# Altium PCB Drone Project.PcbDoc (part 1 of 2)
Units mm, origin at the board's own origin, x right, y up, seen from the top; angles counter-clockwise.
Board outline 39 x 39 mm, 4 copper layers (Top Layer, Int1 (GND), Int2 (GND_2), Bottom Layer), stack 1.564 mm thick; 49 components, 40 nets, 218 pads, 52 vias.
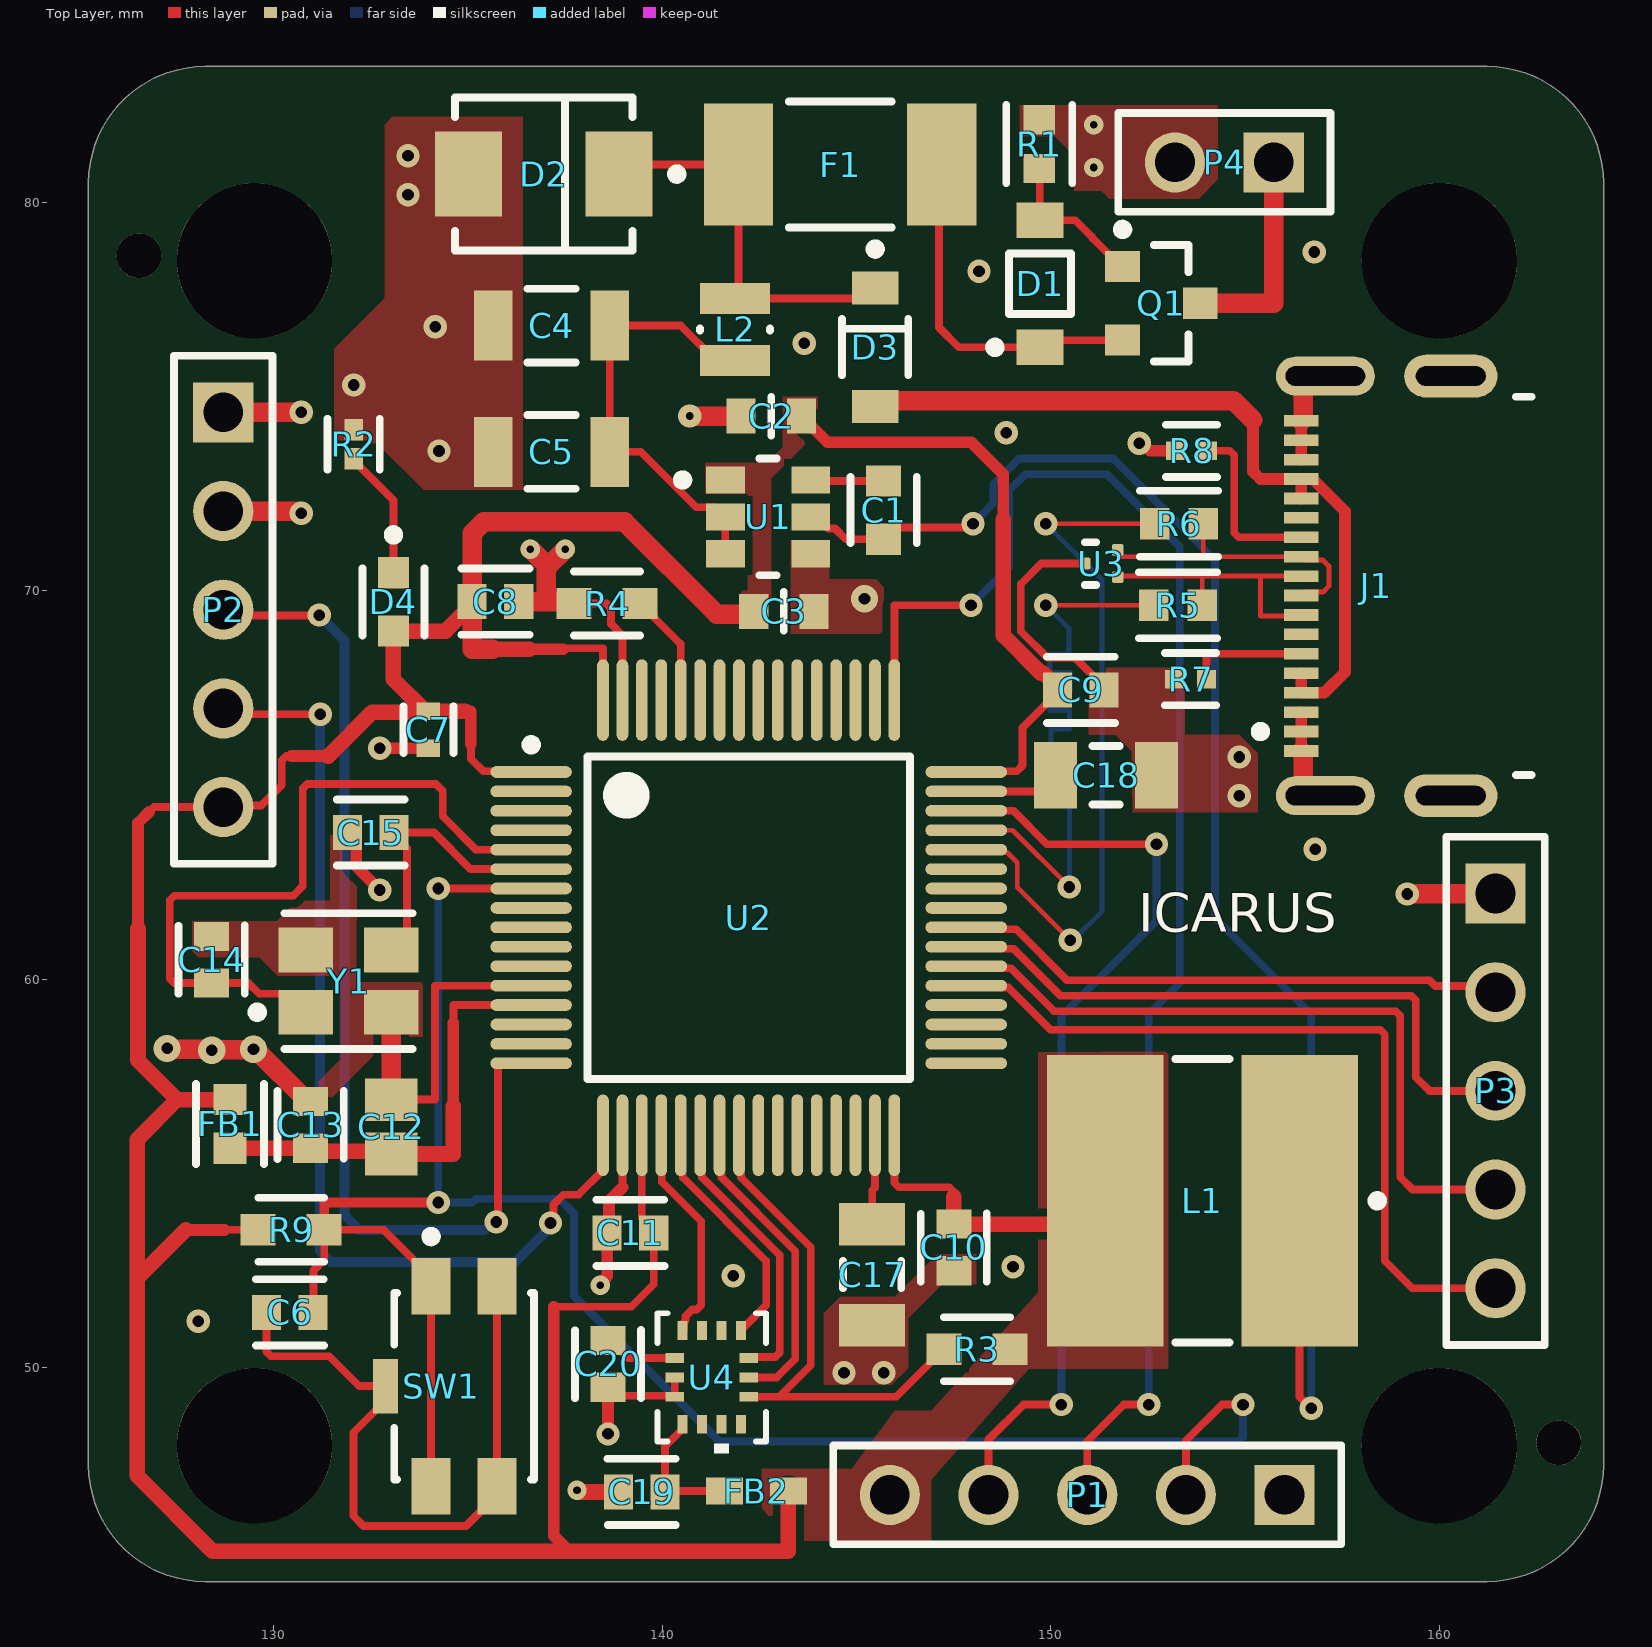
[diagram p0: Top Layer view]
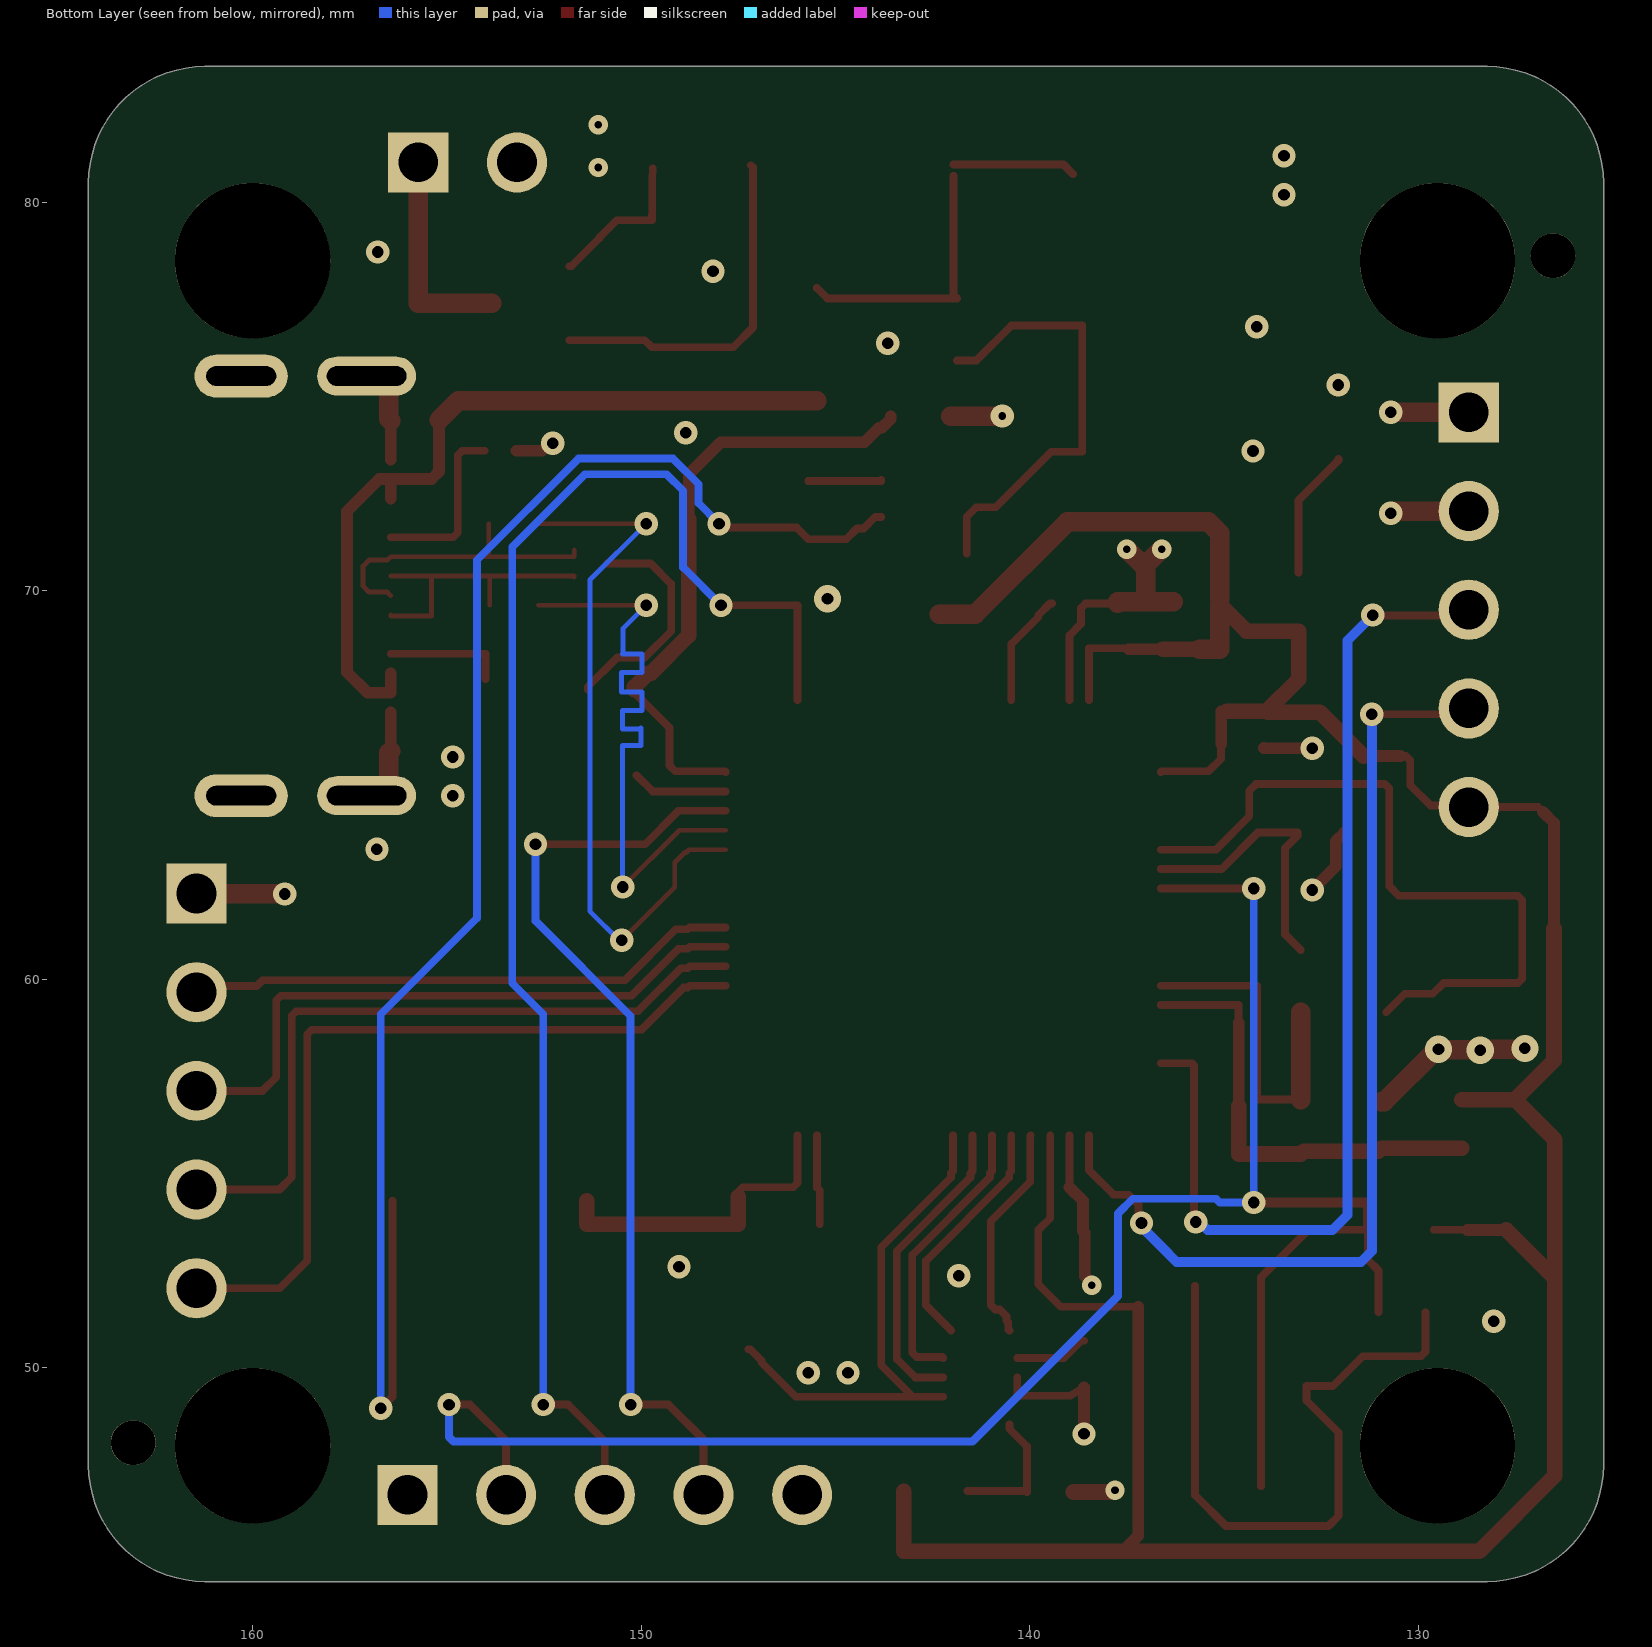
[diagram p1: Bottom Layer view, seen from below]
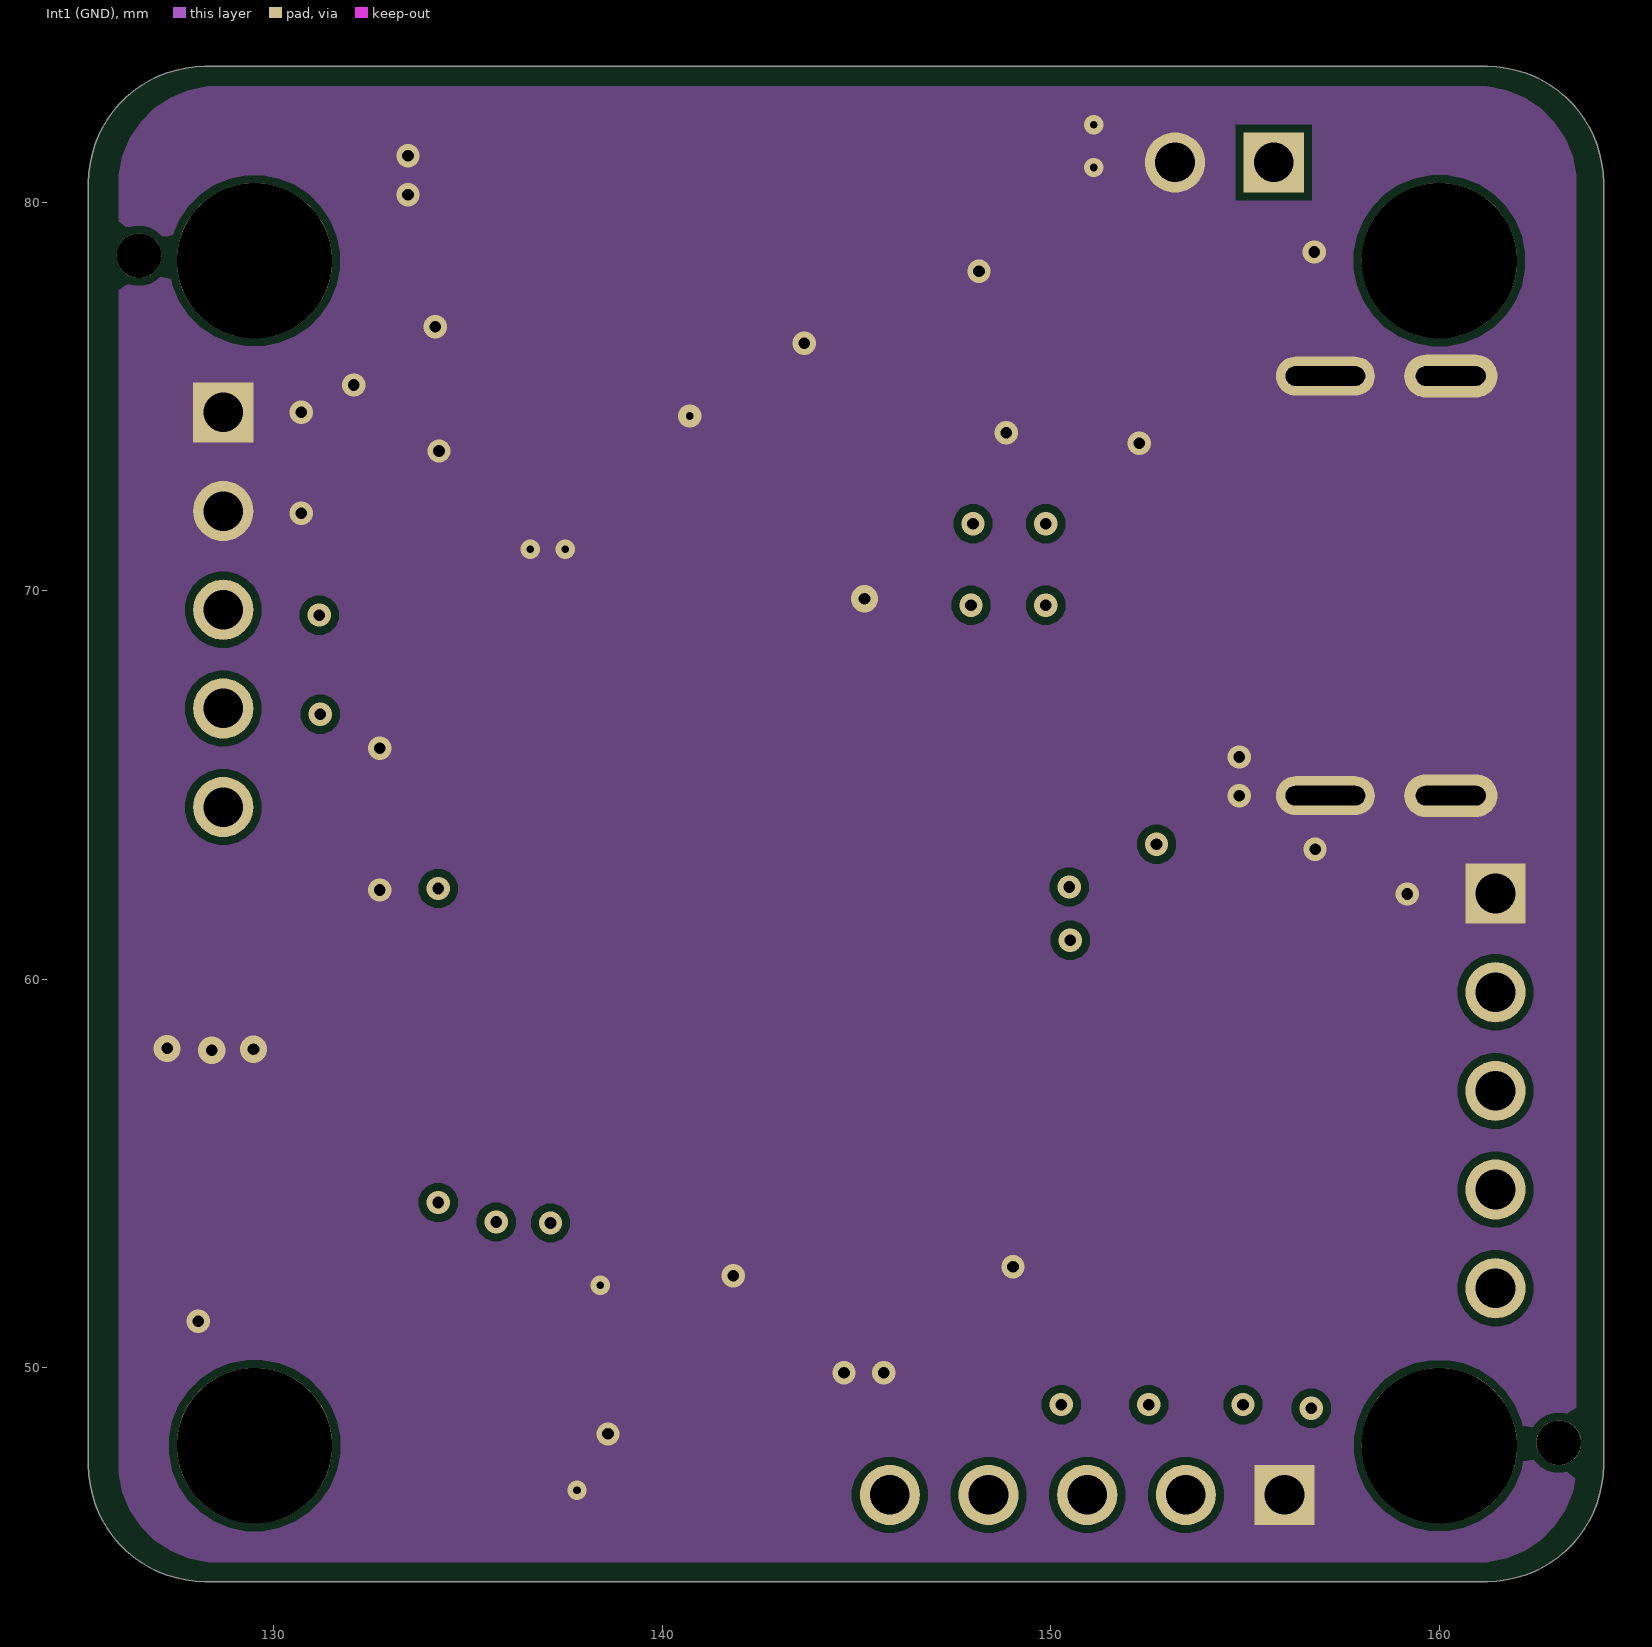
[diagram p2: Int1 (GND)]
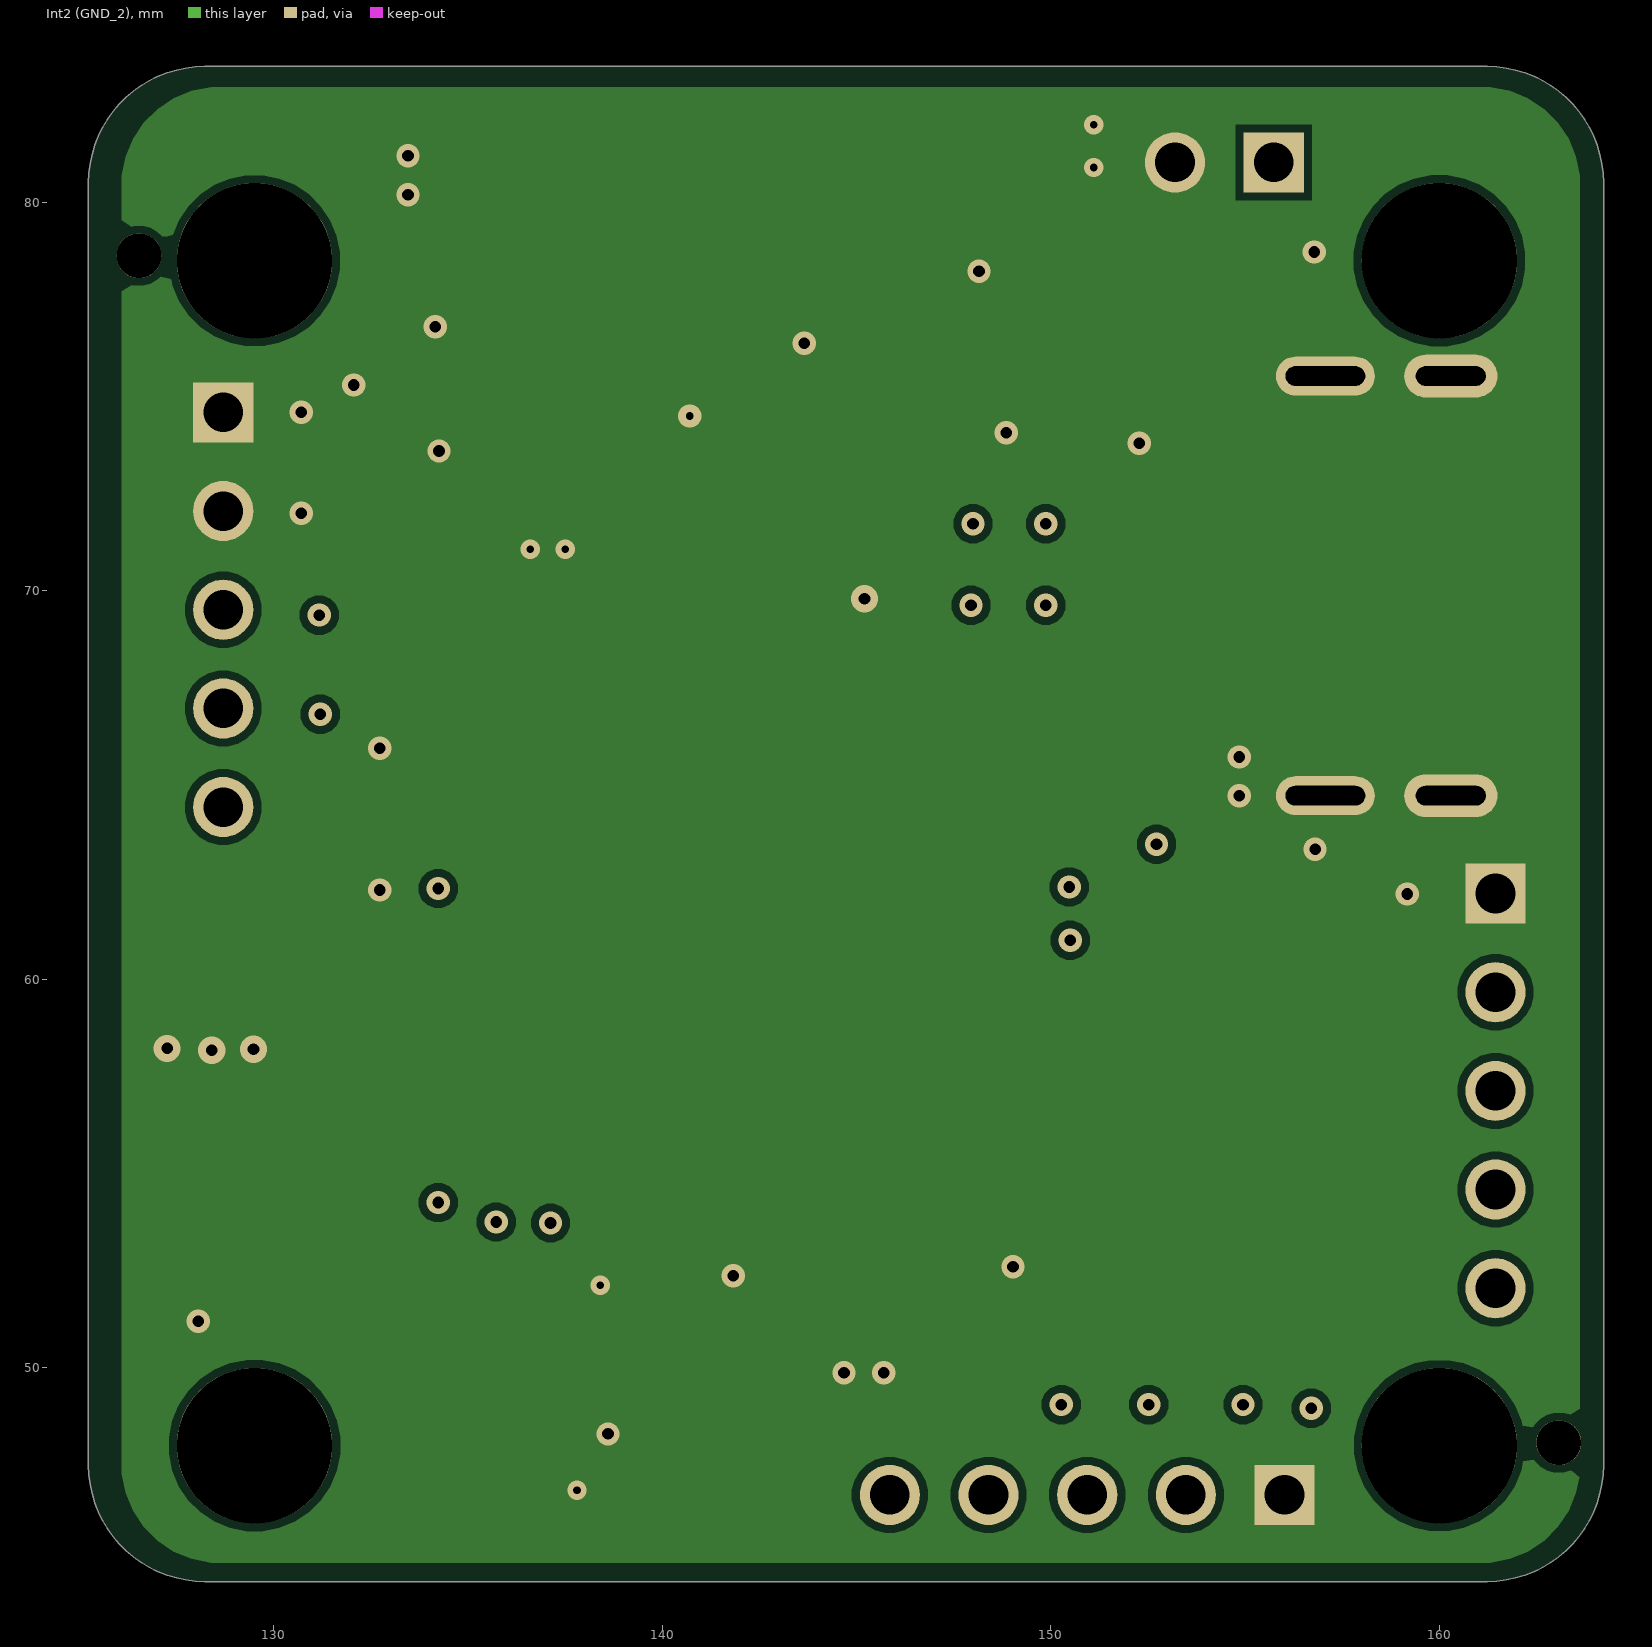
[diagram p3: Int2 (GND_2)]
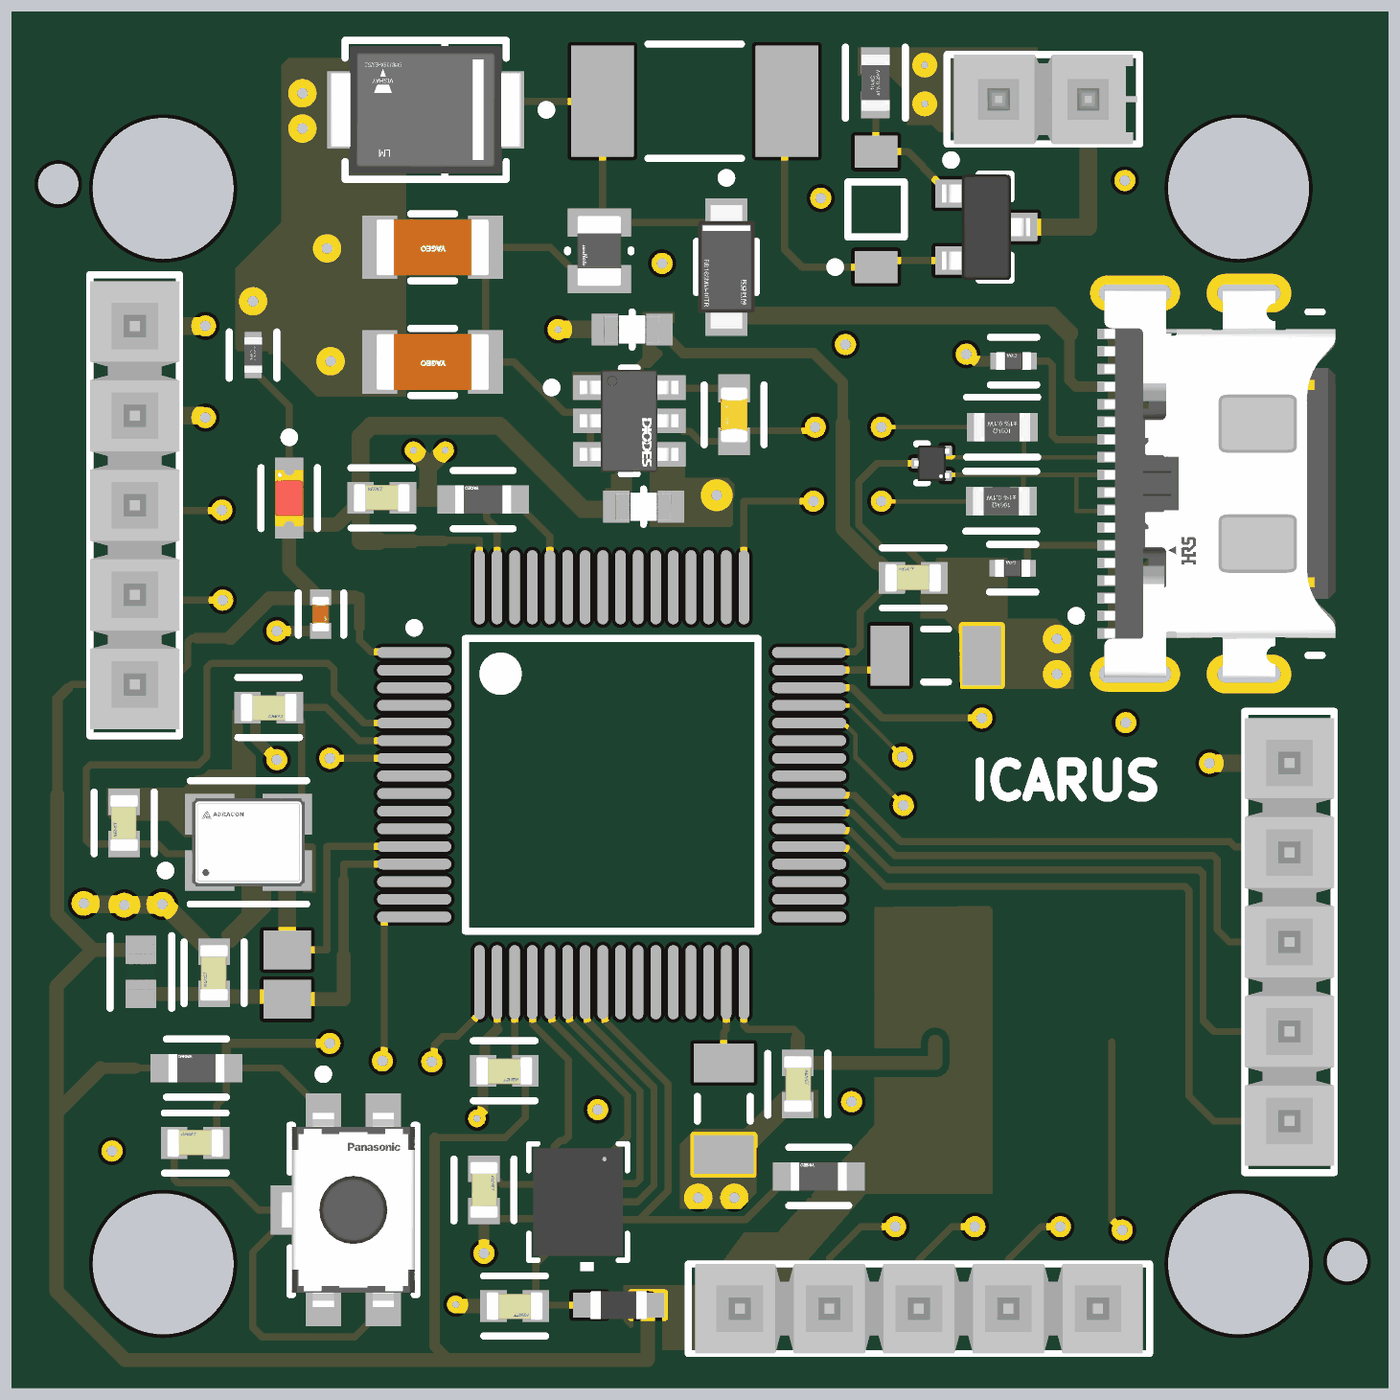
[diagram p4: 3D render of the assembled board from above, using the file's embedded part models]

## Layer stack, top to bottom
Top Solder: solder mask 0.0254, SM-001, Dk 4
Top Layer: signal copper 0.035
Dielectric 1: prepreg 0.0994, PP-017, Dk 4.1
Int1 (GND): signal copper 0.0152
Dielectric 3: core 1.265, Core-039, Dk 4.6
Int2 (GND_2): signal copper 0.0152
Dielectric 5: prepreg 0.0994, PP-017, Dk 4.1
Bottom Layer: signal copper 0.035
Bottom Solder: solder mask 0.0254, SM-001, Dk 4

## Board outline
125.225,47.5 125.225,80.5 cw(c128.225,80.5) 128.225,83.5 161.225,83.5 cw(c161.225,80.5) 164.225,80.5 164.225,47.5 cw(c161.225,47.5) 161.225,44.5 128.225,44.5 cw(c128.225,47.5)

## Design rules (kind name [scope] priority, off if disabled: settings)
Clearance [All] p1: gap=0.2 ignorepadtopadclearanceinfootprint=TRUE except(0.1: Arc-Arc Arc-Track Track-Track)
DiffPairsRouting [All] p1: maxlimit=0.127 minlimit=0.127 mostfreqgap=0.127 toplayer_minwidth=0.125 toplayer_maxwidth=0.125 toplayer_prefwidth=0.125 bottomlayer_minwidth=0.125 bottomlayer_maxwidth=0.125 bottomlayer_prefwidth=0.125 impedanceprofiledriven=TRUE impedanceprofileid={B2BF1141-F29F-4FC9-8BD8-2E5DBA5D9863} impedanceprofilevalue=90.000000 maxuncoupledlength=12.7
HoleSize [All] p1: absolutevalues=TRUE maxlimit=4 minlimit=0.025 maxpercent=80.000 minpercent=20.000
MinimumSolderMaskSliver [All] p1: minsoldermaskwidth=0.1
PolygonConnect [All] p1: connectstyle=Direct reliefconductorwidth=0.254 reliefentries=4 polygonreliefangle="90 Angle" airgapwidth=0.254
RoutingVias [All] p1: holewidth=0.3 width=0.6 viastyle="Through Hole" minholewidth=0.25 minwidth=0.55 maxholewidth=0.4 maxwidth=0.9
SilkToSolderMaskClearance [IsPad] p1: minsilkscreentomaskgap=0.15 clearancetoexposedcopper=TRUE
SolderMaskExpansion [All] p1: expansion=0.102 istentingtop=FALSE
SupplyNets "Schematic Supply Nets_4" [InNet('3V3')] p1: voltage=0.000
SupplyNets "Schematic Supply Nets_3" [InNet('USB_VBUS')] p2: voltage=0.000
SupplyNets "Schematic Supply Nets_2" [InNet('V_BAT')] p3: voltage=0.000
SupplyNets "Schematic Supply Nets_1" [InNet('GND')] p4: voltage=0.000
SupplyNets "Schematic Supply Nets" [InNet('3V3A')] p5: voltage=0.000
Width Width_1 [All] p1: maxlimit=0.5 minlimit=0.1 preferedwidth=0.254 toplayer_prefwidth=0.2 midlayer1_minwidth=0.254 midlayer1_maxwidth=0.254 midlayer2_minwidth=0.254 midlayer2_maxwidth=0.254 bottomlayer_maxwidth=0.254 minimp=50.000000 maximp=50.000000 favimp=50.000000
Width USB_Width [InNet('USB_D_P') Or InNet('USB_D_N')] p2: maxlimit=0.254 minlimit=0.125 preferedwidth=0.254 toplayer_maxwidth=0.125 toplayer_prefwidth=0.125 midlayer1_minwidth=0.254 midlayer2_minwidth=0.254 bottomlayer_maxwidth=0.125 bottomlayer_prefwidth=0.125 minimp=50.000000 maximp=50.000000 favimp=50.000000
26 further rules are at their usual default settings.

## Classes and differential pairs
component class Power: C1 C2 C3 C4 C5 D1 D2 D3 D4 F1 L1 L2 P4 Q1 R1 R2 U1
component class MCU: C6 C7 C8 C9 C10 C11 C12 C13 C14 C15 C17 C18 FB1 R3 R4 R9 SW1 U2 Y1
component class Connectors: C19 C20 FB2 J1 P1 P2 P3 R5 R6 R7 R8 U3 U4
differential pair USB_D: +USB_D_P -USB_D_N

## Components (designator, comment, footprint, x,y, rotation, side; value= is the part's Value field where it differs from the comment)
C1 "CC0603MRX7R9BB104" FP-CC0603-DA-MFG 145.694,72.08 r270 top value="100 nF"
C2 "ZRB18AR61A226ME01K" FP-ZRB18A-0_2-MFG 142.8,74.5 r0 top
C3 "ZRB18AR61A226ME01K" FP-ZRB18A-0_2-MFG 143.125,69.475 r180 top
C4 "CC1206KKX5R9BB106" FP-CC1206-FD-MFG 137.144,76.83 r180 top
C5 "CC1206KKX5R9BB106" FP-CC1206-FD-MFG 137.144,73.58 r180 top
C6 "100n" FP-C0603C-CF-MFG 130.409,51.429 r0 top value="0.10 μF"
C7 "10u" FP-GRM155-0_2-MFG 133.969,66.43 r270 top
C8 "100n" FP-C0603C-CF-MFG 135.7,69.725 r0 top value="0.10 μF"
C9 "100n" FP-C0603C-CF-MFG 150.769,67.455 r0 top value="0.10 μF"
C10 "100n" FP-C0603C-CF-MFG 147.5,53.1 r270 top value="0.10 μF"
C11 "100n" FP-C0603C-CF-MFG 139.175,53.475 r180 top value="0.10 μF"
C12 "1u" CAPC2013X145X50LL20T25 133.019,56.205 r90 top
C13 "100n" FP-C0603C-CF-MFG 130.944,56.255 r90 top value="0.10 μF"
C14 "10p" FP-C0603C-CF-MFG 128.394,60.505 r90 top value="10 pF"
C15 "10p" FP-C0603C-CF-MFG 132.494,63.78 r180 top value="10 pF"
C17 "2.2u" CAPC3216X180X50LL20T25 145.4,52.4 r270 top
C18 "2.2u" CAPC3216X180X50LL20T25 151.419,65.255 r0 top
C19 "100n" FP-C0603C-CF-MFG 139.469,46.805 r180 top value="0.10 μF"
C20 "100n" FP-C0603C-CF-MFG 138.6,50.1 r270 top value="0.10 μF"
D1 "SZMMSZ4696T1G" ONSC-SOD-123-2-425-04_V 149.719,77.905 r90 top
D2 "SMBJ15A-E3/52" FP-95401-MFG 136.944,80.73 r180 top
D3 "RB168MM-40TR" FP-PMDU-MFG 145.475,76.275 r270 top
D4 "SML-LX0603SIW-TR" FP-SML-LX0603SIW-TR-MFG 133.076,69.717 r270 top
F1 "1812L075/24DR" LFUS-1812L07524DR_V 144.575,80.975 r180 top
FB1 "MPZ1608S101ATAH0" FP-MPZ1608-0_6-IPC_C 128.869,56.28 r90 top
FB2 "742863160" "WE-CBF HF_0603_HC" 142.419,46.83 r180 top
J1 "CX90M-16P" FP-CX90M-16P-MFG 159.469,70.13 r90 top
L1 "744787039" WE-PD2SR_7850 -1116.1,-1215.7 r180 top
L2 "LQM2MPN1R0MGHL" FP-LQM2MPN_GH-MFG 141.869,76.73 r270 top
P1 "TSW-105-05-F-S" SMTC-TSW-105-05-X-S 156.014,46.73 r180 top
P2 "TSW-105-05-F-S" SMTC-TSW-105-05-X-S 128.694,74.595 r270 top
P3 "TSW-105-05-F-S" SMTC-TSW-105-05-X-S 161.444,62.21 r270 top
P4 "TSW-102-26-T-S" SMTC-TSW-102-26-XX-S 155.734,81.03 r180 top
Q1 "DMP3098L-7" DIOD-SOT23-3_V 152.844,77.405 r0 top
R1 "CRGP0603F100K" FP-CRGP0603-IPC_C 149.7,81.5 r90 top value=100KΩ
R2 "1k" FP-CRGCQ0402-IPC_C 132.05,73.775 r90 top value=1KΩ
R3 "10K" FP-AC0603-MFG 148.094,50.48 r180 top
R4 "10k" FP-AC0603-MFG 138.575,69.675 r180 top
R5 "22R" FP-CRGCQ0603-IPC_C 153.269,69.63 r180 top value=22Ω
R6 "22R" FP-CRGCQ0603-IPC_C 153.294,71.73 r180 top value=22Ω
R7 "5.1k" FP-RN73R1E-IPC_C 153.594,67.73 r180 top
R8 "5.1k" FP-RN73R1E-IPC_C 153.619,73.605 r180 top
R9 "10kR" FP-AC0603-MFG 130.444,53.555 r180 top
SW1 "EVQ-P2F02K" FP-EVQ-P2F02K-MFG 134.894,49.53 r0 top
U1 "AP63203WU-7" FP-TSOT26-MFG 142.719,71.905 r0 top
U2 "STM32F405RGT6" STM-LQFP64_M 142.22,61.589 r0 top
U3 "TPD2EUSB30DRTR" DRT0003A 151.294,70.705 r180 top
U4 "BMI270" BMI270_BOS 141.269,49.755 r270 top
Y1 "16MHz" FP-ABM8W-MFG 131.919,59.955 r0 top

## Footprints (in the part's own frame and the unit in brackets; to place one, negate y for a bottom-side part, rotate by r counter-clockwise, add the part's x,y. Pads: shape width x height; smd on the part's side, far side on the other; paste and mask are expansions set on the pad)
BMI270_BOS [mil]
  rect 19x10 smd paste+0 mask+0: 1(-47.5,29.53) 2(-47.5,9.84) 3(-47.5,-9.84) 4(-47.5,-29.53) 8(47.5,-29.53) 9(47.5,-9.84) 10(47.5,9.84) 11(47.5,29.53)
  rect 10x19 smd paste+0 mask+0: 5(-19.68,-37.5) 6(0,-37.5) 7(19.69,-37.5) 12(19.69,37.5) 13(0,37.5) 14(-19.68,37.5)
  silkscreen extent -65,-55 77,55, body extent -60,-50 60,50, height 34
CAPC2013X145X50LL20T25 [mm] "Chip Capacitor, 2-Leads, Body 2.00x1.25mm, IPC High Density"
  rect 1.1x1.35 smd: 1(-0.7,0) 2(0.7,0)
  body extent -1.1,-0.72 1.1,0.72, height 1.45
CAPC3216X180X50LL20T25 [mm] "Chip Capacitor, 2-Leads, Body 3.20x1.60mm, IPC High Density"
  rect 1.1x1.7 smd: 1(-1.3,0) 2(1.3,0)
  silkscreen extent -0.35,-0.75 0.35,0.75, body extent -1.7,-0.9 1.7,0.9, height 1.8
DIOD-SOT23-3_V [mm] "SOT23, 3-Leads, Body 3x1.4mm, Pitch 0.95mm"
  rect 0.9x0.8 smd: 1(-1,0.95) 2(-1,-0.95) 3(1,0)
  silkscreen extent -1.12,-1.5 0.7,2.02, body extent -1.25,-1.5 1.25,1.5, height 1.1
DRT0003A [mm] "SOTFL, 3-Leads, Body 1x1mm (inc leads), Pitch 0.35mm"
  rrect33% 0.3x0.3 smd: 1(-0.425,0.35) 2(-0.425,-0.35) 3(0.425,0)
  silkscreen extent 0.13,-0.55 0.43,0.55, body extent -0.5,-0.5 0.5,0.5, height 0.5
FP-95401-MFG [mil]
  rect 67.5x86 smd paste+0 mask+0: 1(-76.25,0) 2(76.25,0)
  silkscreen extent -140,-78 90,78, body extent -114,-81 114,81, height 10
FP-ABM8W-MFG [mm]
  rect 1.4x1.15 smd paste+0 mask+0: 1(-1.1,-0.8) 2(1.1,-0.8) 3(1.1,0.8) 4(-1.1,0.8)
  silkscreen extent -2.47,-1.75 1.65,1.75, body extent -1.9,-1.48 1.9,1.48, height 0.25
FP-AC0603-MFG [mm]
  rect 0.9x0.8 smd paste+0 mask+0: 1(-0.85,0) 2(0.85,0)
  silkscreen extent -0.85,-0.82 0.85,0.82, body extent -1.4,-0.55 1.4,0.55, height 0.25
FP-C0603C-CF-MFG [mm]
  rect 0.75x0.9 smd paste+0 mask+0: 1(-0.6,0) 2(0.6,0)
  silkscreen extent -0.87,-0.85 0.88,0.85, body extent -1.2,-0.6 1.2,0.6, height 0.25
FP-CC0603-DA-MFG [mm]
  rect 0.8x0.9 smd paste+0 mask+0: 1(-0.75,0) 2(0.75,0)
  silkscreen extent -0.85,-0.85 0.85,0.85, body extent -1.35,-0.75 1.35,0.75, height 0.25
FP-CC1206-FD-MFG [mm]
  rect 1x1.8 smd paste+0 mask+0: 1(-1.5,0) 2(1.5,0)
  silkscreen extent -0.63,-0.95 0.63,0.95, body extent -2.32,-1.38 2.32,1.38, height 0.25
FP-CRGCQ0402-IPC_C [mm]
  rect 0.56x0.472 smd paste+0 mask+0: 1(-0.376,0) 2(0.376,0)
  silkscreen extent -0.66,-0.67 0.66,0.67, body extent -0.76,-0.38 0.76,0.38, height 0.25
FP-CRGCQ0603-IPC_C [mm]
  rect 0.758x0.812 smd paste+0 mask+0: 1(-0.627,0) 2(0.627,0)
  silkscreen extent -1.01,-0.85 1.01,0.85, body extent -1.11,-0.55 1.11,0.55, height 0.25
FP-CRGP0603-IPC_C [mm]
  rect 0.758x0.812 smd paste+0 mask+0: 1(-0.627,0) 2(0.627,0)
  silkscreen extent -1.01,-0.85 1.01,0.85, body extent -1.11,-0.55 1.11,0.55, height 0.25
FP-CX90M-16P-MFG [mm]
  rect 0.3x0.9 smd paste+0 mask+0: 1(-4.25,3.025) 2(4.25,3.025) A1(-3.75,3.025) A4(-2.75,3.025) A5(-1.75,3.025) A6(-0.75,3.025) A7(0.75,3.025) A8(1.75,3.025) A9(2.75,3.025) A12(3.75,3.025) B1(3.25,3.025) B4(2.25,3.025) B5(1.25,3.025) B6(0.25,3.025) B7(-0.25,3.025) B8(-1.25,3.025) B9(-2.25,3.025) B12(-3.25,3.025)
  rrect100% 1x2.55 hole 2.05 slot 0.5 at 0 deg paste-2539.97 mask+0: 3(-5.4,2.405) 4(5.4,2.405)
  rrect100% 1.1x2.4 hole 1.8 slot 0.5 at 0 deg paste-2539.97 mask+0: 5(-5.4,-0.825) 6(5.4,-0.825)
  silkscreen extent -4.87,-2.9 4.87,4.2, body extent -6.05,-3.37 6.05,3.78, height 0.25
FP-EVQ-P2F02K-MFG [mm]
  rect 1x1.45 smd paste+0 mask+0: 1(-0.85,2.575) 2(0.85,2.575) 3(-0.85,-2.575) 4(0.85,-2.575)
  rect 0.65x1.4 smd paste+0 mask+0: 5(-2.025,0)
  silkscreen extent -1.8,-2.4 1.8,3.97, body extent -2.45,-3.4 1.9,3.4, height 0.25
FP-GRM155-0_2-MFG [mm]
  rect 0.45x0.6 smd paste+0 mask+0: 1(-0.475,0) 2(0.475,0)
  silkscreen extent -0.6,-0.64 0.6,0.65, body extent -0.8,-0.45 0.8,0.45, height 0.25
FP-LQM2MPN_GH-MFG [mm]
  rect 0.8x1.8 smd paste+0 mask+0: 1(-0.8,0) 2(0.8,0)
  silkscreen extent -0.03,-0.9 0.03,0.9, body extent -1.3,-1 1.3,1, height 0.25
FP-MPZ1608-0_6-IPC_C [mm]
  rect 0.806x0.858 smd paste+0 mask+0: 1(-0.626,0) 2(0.626,0)
  silkscreen extent -1.03,-0.87 1.03,0.87, body extent -1.13,-0.58 1.13,0.58, height 0.25
FP-PMDU-MFG [mm]
  rect 0.85x1.2 smd paste+0 mask+0: 1(-1.525,0) 2(1.525,0)
  silkscreen extent -2.65,-0.85 0.72,0.85, body extent -2.05,-0.95 2.05,0.95, height 0.25
FP-RN73R1E-IPC_C [mm]
  rect 0.488x0.472 smd paste+0 mask+0: 1(-0.414,0) 2(0.414,0)
  silkscreen extent -0.66,-0.67 0.66,0.67, body extent -0.76,-0.38 0.76,0.38, height 0.25
FP-SML-LX0603SIW-TR-MFG [mm]
  rect 0.8x0.8 smd paste+0 mask+0: 1(-0.75,0) 2(0.75,0)
  silkscreen extent -1.85,-0.8 0.86,0.8, body extent -1.25,-0.56 1.25,0.56, height 0.25
FP-TSOT26-MFG [mm]
  rect 1x0.7 smd paste+0 mask+0: 1(-1.099,0.95) 2(-1.099,0) 3(-1.099,-0.95) 4(1.099,-0.95) 5(1.099,0) 6(1.099,0.95)
  silkscreen extent -2.32,-1.5 0.22,1.5, body extent -1.7,-1.6 1.7,1.6, height 0.25
FP-ZRB18A-0_2-MFG [mm]
  rect 0.75x0.9 smd paste+0 mask+0: 1(-0.775,0) 2(0.775,0)
  silkscreen extent 0,-0.5 0,0.5, body extent -1.25,-0.6 1.25,0.6, height 0.25
LFUS-1812L07524DR_V [mm] "SMD, 2-Leads, Body 4.55x3.24mm"
  rect 1.78x3.15 smd: 1(-2.615,0) 2(2.615,0)
  silkscreen extent -1.33,-1.62 1.33,1.62, body extent -2.27,-1.62 2.27,1.62, height 1.55
ONSC-SOD-123-2-425-04_V [mm] "SOD, 2-Leads, Body 2.69x1.6mm"
  rect 0.91x1.22 smd: 1(-1.635,0) 2(1.635,0)
  silkscreen extent -1.76,-0.8 0.78,1.28, body extent -1.35,-0.8 1.35,0.8, height 1.35
SMTC-TSW-102-26-XX-S [mm] ".025 SQ Post Terminal Strip Assembly, 1x2 Pins, Vertical, 2.54mm Pitch, Male"
  rect 1.55x1.55 hole 1.02: 1(0,0)
  round 1.55 hole 1.02: 2(2.54,0)
  silkscreen extent -1.46,-1.27 4,1.27, body extent -1.4,-1.27 3.81,1.27, height 8.38
SMTC-TSW-105-05-X-S [mm] ".025 SQ Post Terminal Strip Assembly, 1x5 Pins, Vertical, 2.54mm Pitch, Male"
  rect 1.55x1.55 hole 1.02: 1(0,0)
  round 1.55 hole 1.02: 2(2.54,0) 3(5.08,0) 4(7.62,0) 5(10.16,0)
  silkscreen extent -1.46,-1.27 11.62,1.27, body extent -1.27,-1.27 11.43,1.27, height 5.21
STM-LQFP64_M [mm] "Thin QFP, 64-Leads, Body 10x10mm, Pitch 0.5mm, IPC Low Density"
  oval 2.1x0.3 smd: 1(-5.6,3.75) 2(-5.6,3.25) 3(-5.6,2.75) 4(-5.6,2.25) 5(-5.6,1.75) 6(-5.6,1.25) 7(-5.6,0.75) 8(-5.6,0.25) 9(-5.6,-0.25) 10(-5.6,-0.75) 11(-5.6,-1.25) 12(-5.6,-1.75) 13(-5.6,-2.25) 14(-5.6,-2.75) 15(-5.6,-3.25) 16(-5.6,-3.75) 33(5.6,-3.75) 34(5.6,-3.25) 35(5.6,-2.75) 36(5.6,-2.25) 37(5.6,-1.75) 38(5.6,-1.25) 39(5.6,-0.75) 40(5.6,-0.25) 41(5.6,0.25) 42(5.6,0.75) 43(5.6,1.25) 44(5.6,1.75) 45(5.6,2.25) 46(5.6,2.75) 47(5.6,3.25) 48(5.6,3.75)
  oval 0.3x2.1 smd: 17(-3.75,-5.6) 18(-3.25,-5.6) 19(-2.75,-5.6) 20(-2.25,-5.6) 21(-1.75,-5.6) 22(-1.25,-5.6) 23(-0.75,-5.6) 24(-0.25,-5.6) 25(0.25,-5.6) 26(0.75,-5.6) 27(1.25,-5.6) 28(1.75,-5.6) 29(2.25,-5.6) 30(2.75,-5.6) 31(3.25,-5.6) 32(3.75,-5.6) 49(3.75,5.6) 50(3.25,5.6) 51(2.75,5.6) 52(2.25,5.6) 53(1.75,5.6) 54(1.25,5.6) 55(0.75,5.6) 56(0.25,5.6) 57(-0.25,5.6) 58(-0.75,5.6) 59(-1.25,5.6) 60(-1.75,5.6) 61(-2.25,5.6) 62(-2.75,5.6) 63(-3.25,5.6) 64(-3.75,5.6)
  silkscreen extent -5.72,-4.15 4.15,4.57, body extent -5,-5 5,5, height 1.6
"WE-CBF HF_0603_HC" [mm] "SMD EMI Suppression Ferrite  Bead, body 1.60x0.80mm"
  rect 0.95x0.7 smd: 1(-0.825,0) 2(0.825,0)
  body extent -0.8,-0.4 0.8,0.4, height 0.8
WE-PD2SR_7850 [mm] "SMD Shielded Power Inductor, body 7.8x7.0mm"
  rect 3x7.5 smd: 1(-1272.5,-1270) 2(-1267.5,-1270)
  silkscreen extent -1274.63,-1273.65 -1269.3,-1266.35, body extent -1273.9,-1273.5 -1266.1,-1266.5, height 5

## Part data
C1: library part CMP-03422-000537-1, "CAP CER 0.1UF 50V X7R 0603", Capacitance="100 nF", Manufacturer=YAGEO, Package=CC0603-DA, Temperature="-55°C to +125°C", Temperature Characteristic=X7R, Temperature Coefficient=15%, Temperature Range High=+125°C, Temperature Range Low=-55°C, Tolerance=0.2, Voltage="50 V", Automotive=No, Category=Cap, ComponentLink2Description=Datasheet, ComponentLink2URL=http://www.yageo.com/documents/recent/UPY-GPHC_X7R_6.3V-to-50V_18.pdf, Device Class L1="Passive Components", Device Class L2=Capacitors, Device Class L3="Ceramic Capacitors", Digikey Description="CAP CER 0.1UF 50V X7R 0603", Footprint Url=http://www.yageo.com/exep/pages/download/literatures/UPY-C_GEN_24.pdf, Height=0.9mm, Lead Free=Yes, Manufacturer Part Number=CC0603MRX7R9BB104, Material=Ceramic, Mouser Description="Cap Ceramic 50V 20% +Tol 20% -Tol X7R 15% TC 0.1uF SMD 0603", Octopart=https://octopart.com/cc0603mrx7r9bb104-yageo-67308423, RoHS=TRUE, Voltage Rating="50 V"
C2 C3: library part CMP-06035-026751-1, "CAP CER MLCC"
C4 C5: library part CMP-03422-001420-1, "CAP CER 10UF 50V X5R 1206", Capacitance=10uF, Case/Package=1206, Dielectric=X5R, Max Operating Temperature=85°C, Min Operating Temperature=-55°C, Tolerance=10%, Voltage Rating=50V, Halogen Free="Halogen Free", Lead Free="Lead Free", Length=0.126inch, Mount="Surface Mount", Packaging="Tape and Reel", RoHS Compliant=Yes, Thickness=0.075inch, Voltage Rating (DC)=50V, Width=0.063inch
C6 C8 C9 C10 C11 C13 C19 C20: library part CMP-2006-03066-2, "CAP CER 0.1UF 25V Y5V 0603", Capacitance="0.10 μF", Manufacturer=KEMET, Manufacturer Part Number=C0603C104M3VACTU, Package=C0603C-CF, Temperature="-55°C to +125°C", Temperature Characteristic=Y5V, Temperature Coefficient=30ppm/°C, Temperature Range High=+125°C, Temperature Range Low=-55°C, Tolerance=0.2, Voltage Rating="25 V", Automotive=Yes, Automotive Grade="Grade 1", Category=Cap, ComponentLink2Description=Datasheet, ComponentLink2URL=https://api.kemet.com/component-edge/download/datasheet/C0603C100J5GACAUTO.pdf, Device Class L1="Passive Components", Device Class L2=Capacitors, Device Class L3="Ceramic Capacitors", Digikey Description="CAP CER 0.1UF 25V Y5V 0603", Height=0.87mm, Lead Free=Yes, Material=Ceramic, Mouser Description="Multilayer Ceramic Capacitors MLCC - SMD/SMT 25volts 0.1uF Y5V 20%", Octopart=https://octopart.com/c0603c104m3vactu-kemet-149363, RoHS=TRUE
C7: library part CMP-00260-135863761-1, "GRM155D70G106ME18D SMD Chip Multilayer Ceramic Capacitor", Capacitance=10µF, Case/Package=0402, Dielectric=X7T, Voltage Rating (DC)=4V, Length=1mm, Lifecycle Status=Production, NexarPartId=135863761, Thickness=500µm, Width=500µm
C12: library part CMP-1036-04746-2, Manufacturer=Kemet, Part Number=C0805C105K4PACTU
C14 C15: library part CMP-03020-033857-1, "CAP CER 10PF 100V C0G/NP0 0603", Capacitance="10 pF", Manufacturer=KEMET, Manufacturer Part Number=C0603C100J1GACAUTO, Package=C0603C-CF, Temperature="-55°C to +125°C", Temperature Characteristic=C0G, Temperature Coefficient=30ppm/°C, Temperature Range High=+125°C, Temperature Range Low=-55°C, Tolerance=0.05, Voltage Rating="100 V", Automotive=Yes, Automotive Grade="Grade 1", Category=Cap, ComponentLink2Description=Datasheet, ComponentLink2URL=https://api.kemet.com/component-edge/download/datasheet/C0603C100J5GACAUTO.pdf, Device Class L1="Passive Components", Device Class L2=Capacitors, Device Class L3="Ceramic Capacitors", Digikey Description="CAP CER 10PF 100V C0G/NP0 0603", Height=0.87mm, Lead Free=Yes, Material=Ceramic, Mouser Description="Cap Ceramic 10pF 100V C0G 5% Pad SMD 0603 125C Automotive T/R", Octopart=https://octopart.com/c0603c100j1gacauto-kemet-31033705, RoHS=TRUE
C17 C18: library part CMP-1037-04812-2, "Chip Capacitor, 2.2 uF, +/- 10%, 16 V, -55 to 125 degC, 1206 (3216 Metric), RoHS, Tape and Reel", Capacitance=2.2uF, Capacitance - nF=2200nF, Case Code - in=1206, Case Code - mm=3216, Case Height=1mm, Case Length=3.2mm, Case Width=1.6mm, Dielectric=X7R, Manufacturer=Kemet, Maximum Operating Temperature=+125C, Minimum Operating Temperature=-55C, Operating Temperature Range=-55Cto+125C, Package / Case=1206(3216metric), Package Description="2-Pin Surface Mount Device, Body 3.2 x 1.6 mm", Temperature Coefficient / Code=+/-15%, Tolerance=10%, Voltage Rating=16V, Brand=Kemet, Class=Class1, Datasheet URL=http://www.kemet.com/docfinder?Partnumber=C1206C106K8RACTU, Datasheet Version=02/2016, Dimensions=1.6mmWx3.2mmLx1mmH, Dissipation Factor DF=5, Factory Pack Quantity=2000, Manufacturer URL=http://www.kemet.com/, Mounting Technology=SurfaceMount, Package Reference=1206, Packaging=Reel, Product=GeneralTypeMLCCs, Product Category=MultilayerCeramicCapacitorsMLCC-SMD/SMT, RoHS=Details, Series=C1206C, Termination Style=SMD/SMT, Type=SMDMLCCX7R6.3-250VDCCommericalGrade, Voltage Rating DC=16V
D1: library part CMP-1060-00433-1, "Zener Voltage Regulator, 500 mW, 2-Pin SOD-123, Pb-Free, Tape and Reel", Manufacturer="On Semiconductor", ComponentLink1Description="Manufacturer URL", ComponentLink1URL=http://www.onsemi.com/, ComponentLink2Description=Datasheet, ComponentLink2URL=http://www.onsemi.com/pub_link/Collateral/MMSZ4678T1-D.PDF, ComponentLink3Description="Package Specification", ComponentLink3URL=http://www.onsemi.com/pub_link/Collateral/425-04.PDF, DatasheetVersion="Rev. 9", Mounting Technology="Surface Mount", P Max (W)=0.5, PackageDescription="2-Pin SOD, Body 1.6 x 2.69 mm", PackageReference=SOD-123-2-425-04, PackageVersion="Rev. G, 10/2009", Packing="Tape and Reel", PartNumber=SZMMSZ4696T1G, RoHS=Pb-Free, VZ Typ (V)=9.1
D2: library part CMP-02577-000009-1, "TVS DIODE 15V 24.4V DO214AA", Breakdown Voltage=16.7V, Clamping Voltage=24.4V, Manufacturer=Vishay, Max Junction Temp=+150°C, Package=95401, Peak Pulse Current=24.6A, Peak Pulse Power=600W, Reverse Standoff Voltage=15V, Temperature="-55°C to +150°C", Temperature Range Low=-55°C, Automotive=No, Category=Diode, ComponentLink2Description=Datasheet, ComponentLink2URL=https://www.vishay.com/docs/88392/smbj.pdf, Device Class L1="Circuit Protection", Device Class L2="TVS Diodes", Device Class L3=unset, Digikey Description="TVS DIODE 15V 24.4V DO214AA", Direction=Unidirectional, Footprint Url=https://www.vishay.com/docs/95401/smb.pdf, Height=2.44mm, Lead Free=Yes, Manufacturer Part Number=SMBJ15A-E3/52, Mouser Description="TVS Diodes - Transient Voltage Suppressors 600W 15V 5% Uni", Number Of Channels=1, Octopart=https://octopart.com/smbj15a-e3%2F52-vishay-39558613, RoHS=TRUE, Standoff Height=0mm, Temperature Range High=+150°C
D3: library part CMP-08971-000002-1, "DIODE SCHOTTKY 40V 1A PMDU", Forward Current=1A, Manufacturer=Rohm, Max Junction Temp=+150°C, Max Repetitive Reverse Voltage=40V, Max Surge Forward Current=40A, Package=PMDU, Peak Reverse Current=0.05uA, Temperature="to +150°C", Automotive=No, Category=Diode, ComponentLink2Description=Datasheet, ComponentLink2URL=https://www.rohm.com/datasheet/RB168MM-40/rb168mm-40tr-e, Device Class L1="Discrete Semiconductors", Device Class L2=Diodes, Device Class L3="Schottky Diodes", Digikey Description="DIODE SCHOTTKY 40V 1A PMDU", Height=0.9mm, Lead Free=Yes, Manufacturer Part Number=RB168MM-40TR, Mouser Description="Schottky Diodes & Rectifiers 40V-VR 1A-IO 30A-IFSM", Octopart=https://octopart.com/rb168mm-40tr-rohm-65063949, Reverse Voltage=40V, RoHS=TRUE, Temperature Range High=+150°C
D4: library part CMP-57192-000009-1, "LED RED DIFFUSED SMD", Case Code (Imperial)=0603, Case Code (Metric)=1608, Color=Red, Forward Current=20mA, Forward Voltage=2V, Lens Color=White, Max Operating Temperature=85°C, Min Operating Temperature=-25°C, Package Quantity=1, Power Rating=50mW, Approvals=UL, Case/Package=0603, Dominant Wavelength=636nm, Height=0.6mm, Illumination Color=Red, Lead Free="Lead Free", Length=1.6mm, Lens Style=Diffused, Lens Transparency=Diffused, Luminous Intensity=60mcd, Moisture Sensitivity Level=2, Mount="Surface Mount", Number of LEDs=1, Number of Pins=2, Packaging="Tape and Reel", REACH SVHC="No SVHC", RoHS Compliant=Yes, Test Current=20mA, Viewing Angle=140°, Wavelength=636nm, Width=0.8mm
F1: library part CMP-2000-05510-1, "Poly-Fuse(R) Resettable PTC, 24 V, 100 A, -40 to 85 degC, 2-Pin SMD, RoHS, Tape and Reel", Current Rating=100A, Hold Current=0.75A, Manufacturer=Littelfuse, Maximum Voltage=24VDC, Maximum Voltage DC=24V, Operating Temperature Range=-40Cto+85C, Package / Case=1812(4532metric), Package Description="2-Pin Surface Mount Device, Body 4.55 x 3.24 mm", Package Reference=1812L07524DR, Resistance=290mOhms, Trip Current=1.5A, Brand=Littelfuse, Current Rating (Max)=100A, Current Rating - Max=100A, Datasheet URL=http://www.littelfuse.com/~/media/electronics/datasheets/resettable_ptcs/littelfuse_ptc_1812l_datasheet.pdf.pdf, Datasheet Version=02/2016, Dimensions=4.37mmLx3.07mmWx0.75mmH, Factory Pack Quantity=1500, Manufacturer URL=http://www.littelfuse.com/, Mounting Style=SMD/SMT, Mounting Technology=SurfaceMount, Packaging=Reel, Product Category=ResettableFuses-PPTC, RoHS=Details, Series=1812L, Termination Style=SMD/SMT, Type=PolyFuseResettablePTC
FB1: library part CMP-08257-000005-2, "FERRITE BEAD 100 OHM 0603 1LN", Case Code (Imperial)=0603, Case Code (Metric)=1608, Current Rating=3A, DC Resistance (DCR)=30mR, Package Quantity=4000, Tolerance=25%, Case/Package=0603, Core Material=Ferrite, Depth=0.8mm, Height=0.03inch, Impedance=100R, Length=0.063inch, Max DC Current=3A, Mount="Surface Mount", Packaging="Tape and Reel", REACH SVHC="No SVHC", RoHS Compliant=Yes, Width=0.031inch
FB2: library part CMP-0220-00101-3, "Ferrite Bead (emi Suppression), 1.6X0.8X0.8MM (0603), 600O Impedance At 100 Mhz", Case Code (Imperial)=0603, Case Code (Metric)=1608, Case/Package=SMD/SMT, Current Rating=400mA, DC Resistance (DCR)=220mΩ, Max Current Rating=500mA, Max Operating Temperature=125°C, Min Operating Temperature=-55°C, Resistance=350mΩ, Test Frequency=100MHz, Tolerance=25%, Core Material=Ferrite, Depth=800µm, Height=800µm, Impedance=600Ω, Lead Free="Lead Free", Length=1.6mm, Max DC Current=500mA, Mount="Surface Mount", Number of Lines=1, Number of Pins=2, REACH SVHC=Unknown, RoHS=Compliant, Termination=SMD/SMT, Width=800µm
J1: library part CMP-11601-000005-1, "CONN RCPT USB2.0 TYPEC 16POS SMD", Current Rating=1.25A, Flammability Rating="UL94 V-0", Insulation Color=Black, Max Operating Temperature=85°C, Min Operating Temperature=-30°C, Connector Type=USB, Contact Plating=Gold, Gender=Receptacle, Mating Cycles=10000, Mount="Surface Mount", Number of Contacts=16, Number of Ports=1, Packaging="Cut Tape", Shielding=Shielded, Termination=Solder
L1: library part CMP-1397-00011-3, "Fixed Ind 3.9UH 3.8A 20 Mohm SMD", Ambient Temperature Range High=85°C, Ambient Temperature Range Low=-40°C, Case/Package=SMD/SMT, Current Rating=3.8A, DC Resistance (DCR)=16.7mΩ, Inductance=3.9µH, Inductance Tolerance=30%, Max Operating Temperature=125°C, Saturation Current=4A, Self Resonant Frequency=45MHz, Test Frequency=100kHz, Composition=Wirewound, Core Material="Composite, Ferrite", Depth=7mm, Height=4.8mm, Height - Seated (Max)=4.4958mm, Length=7.8mm, Max DC Current=3.8A, Min Operating Temperature=-40°C, Mount="Surface Mount", Number of Pins=2, REACH SVHC=Unknown, RMS Current (Irms)=3.8A, RoHS=Compliant, Series Resistance=16.7mΩ, Shielding=Shielded, Termination=SMD/SMT, Tolerance=30%, Width=7mm
L2: library part CMP-06042-016377-1, "FIXED IND 1UH 1.9A 80 MOHM SMD", Case Code (Imperial)=0806, Case Code (Metric)=2016, Current Rating=1.9A, DC Resistance (DCR)=80mR, Inductance=1uH, Max Operating Temperature=85°C, Min Operating Temperature=-40°C, Package Quantity=3000, Saturation Current=2A, Self Resonant Frequency=60MHz, Test Frequency=1MHz, Tolerance=20%, Case/Package=0806, Core Material=Ferrite, Height=0.9mm, Height - Seated (Max)=0.039inch, Lead Free="Contains Lead", Length=0.079inch, Max DC Current=1.9A, Mount="Surface Mount", Packaging="Tape and Reel", RoHS Compliant=Yes, Shielding=Shielded, Termination=SMD/SMT, Width=1.6mm
P1 P2 P3: library part CMP-1024-00365-1, "0.025\" SQ Post Header, Through-hole, Vertical, -55 to 125 degC, 2.54 mm Pitch, 5-Pin, Male, RoHS", Manufacturer=Samtec, Temperature Range="-55 to 125 degC", ComponentLink1Description="Manufacturer URL", ComponentLink1URL=http://www.samtec.com, ComponentLink2Description=Datasheet, ComponentLink2URL=http://www.samtec.com/documents/webfiles/pdf/TSW_TH.PDF, ComponentLink3Description="Package Specification", ComponentLink3URL=http://www.samtec.com/documents/webfiles/cpdf/TSW-XXX-XX-XXX-X-XX-XXX-MKT.pdf, DatasheetVersion=F-214, Mounting Technology=Through-hole, Orientation=Vertical, PackageDescription=".025[0.64] SQ. Post Terminal Strip Assembly", PackageReference=TSW-105-05-X-S, PackageVersion="DM, 8/1988", PartNumber=TSW-105-05-F-S, Pitch="2.54 mm", RoHS=True
P4: library part CMP-1024-00328-1, "0.025\" SQ Post Header, Through-hole, Vertical, -55 to 105 degC, 2.54 mm Pitch, 2-Pin, Male, RoHS", Manufacturer=Samtec, Temperature Range="-55 to 105 degC", ComponentLink1Description="Manufacturer URL", ComponentLink1URL=http://www.samtec.com, ComponentLink2Description=Datasheet, ComponentLink2URL=http://www.samtec.com/documents/webfiles/pdf/TSW_TH.PDF, ComponentLink3Description="Package Specification", ComponentLink3URL=http://www.samtec.com/documents/webfiles/cpdf/TSW-XXX-XX-XXX-X-XX-XXX-MKT.pdf, DatasheetVersion=F-214, Mounting Technology=Through-hole, Orientation=Vertical, PackageDescription=".025[0.64] SQ. Post Terminal Strip Assembly", PackageReference=TSW-102-26-XX-S, PackageVersion="DM, 8/1988", PartNumber=TSW-102-26-T-S, Pitch="2.54 mm", RoHS=True
Q1: library part CMP-0697-00001-2, "P-Channel Enhancement Mode MOSFET, -30 V VDS, -55 to 155 degC, 3-Pin SOT23, RoHS, Tape and Reel", Manufacturer="Diodes Inc", Operating Temperature Range="-55 to 150 degC", ComponentLink1Description="Manufacturer URL", ComponentLink1URL=http://www.diodes.com/, ComponentLink2Description=Datasheet, ComponentLink2URL=http://www.diodes.com/datasheets/ds31447.pdf, ComponentLink3Description="Package Specification", ComponentLink3URL=http://www.diodes.com/datasheets/ap02002.pdf, DatasheetVersion="Rev. 8 - 2", IDS (TA="25 degC)=-3.8 A", Mounting Technology="Surface Mount", PackageDescription="3-Pin Small Outline Transistor, Body 1.3 x 2.9 mm, Pitch 0.95 mm", PackageReference=SOT23, PackageVersion="Rev. 75", Packing="Tape and Reel", PartNumber=DMP3098L-7, PD (TA="25 degC)=1.08 W", RDS(on) (Max.) (VGS="4.5 V)=120 mOhm", RoHS=TRUE, VDS="-30 V", VGS="+/- 20 V", VGS(th) (Max.)="-2.1 V"
R1: library part CMP-03211-000885-1, "CRGP 0603 100K 1%", Ambient Temperature Range High=+70°C, Manufacturer=TE, Package=CRGP0603, Power Rating=0.25W, Resistance=100KΩ, Temperature="-55°C to +155°C", Temperature Coefficient=±100ppm/°C, Temperature Range High=+155°C, Temperature Range Low=-55°C, Tolerance=0.01, Voltage Rating=50V, Automotive=No, Category=Res, ComponentLink2Description=Datasheet, ComponentLink2URL=https://www.te.com/commerce/DocumentDelivery/DDEController?Action=srchrtrv&DocNm=9-1773463-9&DocType=DS&DocLang=English, Composition="Thick Film", Device Class L1="Passive Components", Device Class L2=Resistors, Device Class L3="Chip SMD Resistors", Digikey Description="CRGP 0603 100K 1%", Height=0.55mm, Ipc Land Pattern Name=RESC16080X45, Lead Free=Yes, Manufacturer Part Number=CRGP0603F100K, Octopart=https://octopart.com/crgp0603f100k-te+connectivity-91018719, RoHS=TRUE, Series=CRGP
R2: library part CMP-03211-006314-1, "CRGCQ0402 1KΩ 1% ±100ppm/°C 50V", Ambient Temperature Range High=+70°C, Manufacturer="TE Connectivity", Manufacturer Part Number=CRGCQ0402F1K0, Package=CRGCQ0402, Power Rating=0.0625W, Resistance=1KΩ, Temperature="-55°C to +155°C", Temperature Coefficient=±100ppm/°C, Temperature Range High=+155°C, Temperature Range Low=-55°C, Tolerance=0.01, Voltage Rating=50V, Automotive=Yes, Category=Res, ComponentLink2Description=Datasheet, ComponentLink2URL=https://www.te.com/commerce/DocumentDelivery/DDEController?Action=showdoc&DocId=Data+Sheet%7F1773204-3%7F1%7Fpdf%7FEnglish%7FENG_DS_1773204-3_1.pdf%7F4-2176347-694, Composition="Thick Film", Device Class L1="Passive Components", Device Class L2=Resistors, Device Class L3="Chip SMD Resistors", Height=0.4mm, Ipc Land Pattern Name=RESC10050X35, Lead Free=Yes, Octopart=https://octopart.com/crgcq0402f1k0-te+connectivity-91017946, RoHS=TRUE, Series=CRGCQ
R3 R4 R9: library part CMP-03412-038553-1, "RES 10kΩ 1.00% 0.2W 0603"
R5 R6: library part CMP-03211-006549-1, "CRGCQ 0603 22R 1%", Ambient Temperature Range High=+70°C, Manufacturer="TE Connectivity", Manufacturer Part Number=CRGCQ0603F22R, Package=CRGCQ0603, Power Rating=0.1W, Resistance=22Ω, Temperature="-55°C to +155°C", Temperature Coefficient=±200ppm/°C, Temperature Range High=+155°C, Temperature Range Low=-55°C, Tolerance=0.01, Voltage Rating=75V, Category=Res, ComponentLink2Description=Datasheet, ComponentLink2URL=https://www.te.com/commerce/DocumentDelivery/DDEController?Action=showdoc&DocId=Data+Sheet%7F1773204-3%7F1%7Fpdf%7FEnglish%7FENG_DS_1773204-3_1.pdf%7F4-2176339-310, Composition="Thick Film", Device Class L1="Passive Components", Device Class L2=Resistors, Device Class L3="Chip SMD Resistors", Digikey Description="CRGCQ 0603 22R 1%", Height=0.55mm, Ipc Land Pattern Name=RESC16080X45, Lead Free=Yes, Mouser Description="SMD AEC-Q200 Compliant Thick Film Chip Resistor", Octopart=https://octopart.com/crgcq0603f22r-te+connectivity-91018058, RoHS=TRUE, Series=CRGCQ
R7 R8: library part CMP-04015-008529-1, "5.1kΩ ±1% 0.063W, 1/16W Chip Resistor 0402 (1005 Metric) Moisture Resistant Thin Film"
SW1: library part CMP-05618-000109-1, "SWITCH TACTILE SPST-NO 0.02A 15V", Actuator Color=Black, Contact Current Rating=20mA, Contact Resistance=100mR, Max Operating Temperature=85°C, Max Voltage Rating (DC)=15V, Min Operating Temperature=-40°C, Operating Force=5N, Package Quantity=1, Actuator Length=0.85mm, Actuator Type=Standard, Current Rating=20mA, Depth=5.5mm, Electrical Life=200000Cycles, Illumination Type=Non-Illuminated, Lead Free="Lead Free", Length=3.5mm, Max Current Rating=20mA, Mechanical Life=200000Cycles, Mount="Surface Mount", Orientation=Straight, Packaging="Tape and Reel", Radiation Hardening=No, RoHS Compliant=Yes, Series=EVQP2, Size=3.5mm, Switch Function=Off-Mom, Switch Travel=0.7mm, Termination=J-Bend, Throw Configuration=SPST, Voltage Rating (DC)=15V
U1: library part CMP-12757-000006-1, "IC REG BUCK 3.3V 2A TSOT26", Ambient Temperature Range High=+85°C, Ambient Temperature Range Low=-40°C, Manufacturer="Diodes Inc.", Max Junction Temp=+160°C, Max Supply Voltage=32V, Min Supply Voltage=3.8V, Nominal Supply Current=22uA, Output Current=2A, Output Voltage=3.3V, Package=TSOT26, Switching Frequency=1.1MHz, Temperature="to +160°C", Automotive=No, Category=IC, ComponentLink2Description=Datasheet, ComponentLink2URL=https://www.diodes.com/assets/Datasheets/AP63200-AP63201-AP63203-AP63205.pdf, Device Class L1="Integrated Circuits (ICs)", Device Class L2="Power Management ICs", Device Class L3="Voltage Regulators - Switching", Digikey Description="IC REG BUCK 3.3V 2A TSOT26", Footprint Url=https://www.diodes.com/assets/Package-Files/TSOT26.pdf, Height=1mm, Lead Free=Yes, Manufacturer Part Number=AP63203WU-7, Mouser Description="AP63203 Series 3.3 V 2 A SMT Fixed Low IQ Synchronous Buck - TSOT-26", Number Of Outputs=1, Octopart=https://octopart.com/ap63203wu-7-diodes+inc.-98099550, Output Type=Fixed, RoHS=TRUE, Standoff Height=0.01mm, Switching Topology=Buck, Temperature Range High=+160°C
U2: library part CMP-0243-00019-3, "ARM Cortex-M4 32-bit MCU+FPU, 210 DMIPS, 1024 kB Flash, 192 kB Internal RAM, 51 I/Os, 64-pin LQFP, -40 to 85 degC, Tray", I/Os (High Current)=51, Manufacturer=STMicroelectronics, Operating Frequency(F) (Processor speed) (MHz)=168, Supply Voltage(Vcc) max (V)=3.6, Supply Voltage(Vcc) min (V)=1.8, ComponentLink1Description="Manufacturer URL", ComponentLink1URL=http://www.st.com/web/en/home.html, ComponentLink2Description=Datasheet, ComponentLink2URL=http://www.st.com/st-web-ui/static/active/en/resource/technical/document/datasheet/DM00037051.pdf, ComponentLink3Description="Package Specification", ComponentLink3URL=http://www.st.com/st-web-ui/static/active/en/resource/technical/document/datasheet/DM00037051.pdf, Core="ARM Cortex-M4", D/A Converter=2x12-bit, DatasheetVersion="Rev. 4", FLASH Size (Prog) (kB)=1024, Internal RAM Size (kB)=192, Mounting Technology="Surface Mount", PackageDescription="64-Pin Low Profile Quad Flat Package, 10 x 10 mm Body, 0.5 mm Pitch", PackageReference=LQFP64, PackageVersion="Rev. 4, 06/2013", Packing=Tray, PartNumber=STM32F405RGT6
U3: library part CMP-0326-00046-3, "ESD Solution for Super-Speed (6 Gbps) USB 3.0 Interface, 2 Channels, -40 to +85 degC, 3-pin SOT (DRT), Green (Rohs & No Sb/Br)", Breakdown Voltage(Min)(V)=9, Differential Capacitance(pF)=0.01, IO Capacitance(Typ)(pF)=0.7, IO Leakage Current(nA)=10, Manufacturer="Texas Instruments", 1394 / Firewire=TRUE, ComponentLink1Description=Datasheet, ComponentLink1URL=http://www.ti.com/general/docs/lit/getliterature.tsp?genericPartNumber=TPD2EUSB30&fileType=pdf, ComponentLink2Description="URL Link1", ComponentLink2URL=SamplesURL:http://www.ti.com/product/tpd2eusb30#samples, DatasheetVersion=SLVSAC2C, Eco-Plan="Green (RoHS & no Sb/Br)", HDMI=TRUE, IEC 61000-4-2 Air-Gap(+/- kV)=8, IEC 61000-4-2 Contact(+/- kV)=8, Mounting Technology="Surface Mount", PackageDescription="3-Flat Lead Plastic Small Outline, 1 x 1 mm (inc leads), 0.35 mm Pitch", PackageReference=DRT0003A, PackageVersion="revD, Jun-2008", PartNumber=TPD2EUSB30DRTR, Serial ATA / eSATA=TRUE, SubFamily="ESD Solution", USB Full Speed=TRUE, USB High Speed=TRUE, USB Super Speed=TRUE
U4: "Description", Manufacturer_Name="Bosch Sensortec", Copyright="Copyright (C) 2025 Ultra Librarian. All rights reserved.", Manufacturer_Part_Number=BMI270, RefDes=RefDes, Type=Type
Y1: library part CMP-27762-014646-1, "Crystal 16MHz ±10ppm (Tol) ±10ppm (Stability) 7pF FUND 70Ω 4-Pin SMD T/R"

## Free pads (board coordinates)
  round 4 hole 4 unplated: 1(129.5,78.5) 2(160,78.5) 3(129.5,48) 4(160,48)
  round 1.152 hole 1.152 unplated: TH(126.525,78.625) TH(163.075,48.075)

## Via types
v1: diameter 0.6, hole 0.3, Top Layer to Bottom Layer, 41 vias
v2: diameter 0.5, hole 0.2, Top Layer to Bottom Layer, 6 vias
v3: diameter 0.7, hole 0.3, Top Layer to Bottom Layer, 4 vias
v4: diameter 0.6, hole 0.2, Top Layer to Bottom Layer, 1 vias

## Nets (pads, with @x,y where several pads share a name; then routed paths per layer and width w, separated by ;. In a path a pad name is that pad's centre, name@x,y a point inside that pad or via, vN(x,y) a via of type N, cw(c..) or ccw(c..) an arc to the next point about the centre after c; other vN are vias at no path point)
3V3: C2.2 C3.2 C7.1 C8.1 C9.1 C10.1 C11.1 D4.2 FB1.2 FB2.1 L1.2 P1.5 P2.5 R3.1 R9.2 U1.1 U2.1 U2.19 U2.32 U2.48 U2.64 | length 112.7
  Top Layer w0.2: 126.793,64.318 126.91,64.435 P2.5 128.734,64.475 129.675,64.475 130.2,65 130.2,65.633 130.317,65.75 130.45,65.75 ; 128.725,53.55 128.73,53.555 R9.2 ; 135.069,66.055 135.069,65.68 135.394,65.355 136.604,65.355 U2.1 ; 137.2,51.575 139.2,51.575 139.775,52.15 139.775,52.75 C11.1 139.775,53.55 139.47,53.855 U2.19 ; 137.45,68.5 137.45,68.525 138.47,68.525 U2.64 ; U2.32 145.97,54.767 146.087,54.65 147.383,54.65 147.5,54.533 147.5,54.4 ; U2.48 147.836,65.355 149.119,65.355 149.269,65.505 149.269,66.48 150.169,67.38 C9.1
  Top Layer w0.3: 126.5,61.3 126.5,64.025 126.793,64.318 ; 127.725,53.55 128.725,53.55 ; 130.45,65.75 131.4,65.75 ; 134.919,66.905 135.069,66.905 135.069,66.055 ; 136.575,68.5 137.45,68.5 ; 137.2,51.575 137.2,45.675 137.6,45.275 ; C2.2 143.575,74.425 143.8,74.2 143.875,74.2 144.25,73.825 147.95,73.825 148.775,73 148.775,71.85
  Top Layer w0.4: 126.5,61.3 126.5,57.914 127.508,56.906 ; 127.725,53.55 126.475,52.3 ; FB1.2 127.508,56.906 ; 131.4,65.75 132.53,66.88 133.869,66.88 133.894,66.905 133.076,67.723 D4.2 134.417,68.967 135.1,69.65 C8.1 ; C7.1 134.919,66.905 ; 135.625,68.5 136.575,68.5 ; FB2.1 143.244,45.275 137.6,45.275 128.425,45.275 126.475,47.225 126.475,52.3 ; 147.5,54.4 C10.1 151.4,53.7 L1.2 ; 148.775,71.85 148.775,68.849 149.738,67.886 149.813,67.886 150.169,67.53 C9.1 ; 126.475,52.3 126.475,55.873 127.508,56.906
  Top Layer w0.5: C8.1@135.1,69.65 135.1,68.5 135.625,68.5 ; C8.1@135.1,69.8 135.1,71.482 135.393,71.775 139.025,71.775 141.4,69.4 C3.2@142.325,69.4
3V3A: C12.1 C13.1 FB1.1 U2.13 | length 11.6
  Top Layer w0.2: 134.619,58.88 134.619,59.339 U2.13
  Top Layer w0.3: 134.619,56.73 134.619,58.88
  Top Layer w0.4: FB1.1 C13.1 131.019,55.58 132.944,55.58 C12.1 134.619,55.505 134.619,56.73
GND: C2.1 C3.1 C4.2 C5.2 C7.2 C8.2 C9.2 C10.2 C11.2 C12.2 C13.2 C14.2 C15.2 C17.2 C18.2 C19.2 C20.2 D2.2 J1.1 J1.2 J1.3 J1.4 J1.5 J1.6 J1.A1 J1.A12 J1.B1 J1.B12 P1.1 P2.1 P2.2 P3.1 P4.2 R1.2 R2.2 R4.2 R7.2 R8.2 U1.4 U2.12 U2.18 U2.63 U3.3 U4.6 U4.7 Y1.2 Y1.4 | length 51.7
  Top Layer w0.2: C12.2 134.144,56.905 134.144,59.839 U2.12 ; R4.2 138.558,69.675 138.675,69.558 138.675,69.151 138.97,68.856 U2.63 ; C20.2 138.95,49.282 140.175,49.282 U4.7 U4.6 ; U2.18 138.97,54.655 138.975,54.65 ; U3.3 149.755,70.705 149.225,70.175 149.225,68.965 149.904,68.286 150.613,68.286 151.369,67.53 C9.2
  Top Layer w0.3: C15.2 132.119,63.555 132.119,62.906 v1(132.725,62.3) ; v1(132.725,65.95) 132.727,65.952 133.966,65.952 C7.2 ; v2(138.4,52.125) 138.4,52.179 138.575,52.354 C11.2 138.625,53.525 138.625,54.3 138.975,54.65 ; v1(138.6,48.3) C20.2 ; v1(152.275,73.8) 152.356,73.8 152.551,73.605 R8.2 ; J1.1 J1.A1 J1.B12 ; J1.B1 J1.A12 J1.2
  Top Layer w0.4: v2(137.8,46.85) 137.827,46.85 137.872,46.805 C19.2
  Top Layer w0.5: v3(127.25,58.225) 127.275,58.2 128.375,58.2 v3(128.4,58.175) 128.413,58.188 129.462,58.188 v3(129.475,58.2) 129.524,58.2 130.869,56.855 C13.2 ; P2.2 130.618,72.055 130.673,72 v1(130.7,72) ; P2.1 128.699,74.6 v1(130.7,74.6) ; C12.2 Y1.2 ; C8.2 137.012,69.725 ; v2(136.6,71.075) 137.012,70.663 ; v2(137.5,71.075) 137.087,70.663 137.012,70.663 ; R4.2 137.725,69.725 137.012,69.725 ; v4(140.7,74.5) C2.1 ; v1(152.275,73.8) v1@152.294,73.781 ; J1.1 156.492,65.833 156.492,64.961 156.722,64.73 J1.3 ; J1.2 156.492,74.427 156.492,75.299 156.722,75.53 J1.4 ; v1(159.175,62.2) 161.434,62.2 P3.1 ; 137.012,69.725 137.012,70.663
  other v1: 144.675,49.875 145.7,49.875 128.05,51.2 141.825,52.375 149.025,52.6 156.8,63.35 154.85,64.725 154.85,65.725 134.25,73.6 148.85,74.075 132.05,75.3 143.65,76.375 134.15,76.8 148.15,78.225 156.775,78.725 133.45,80.2 133.45,81.2
  other v2: 151.1,80.9 151.1,82
  other v3: 145.2,69.8
HSE_IN: C14.1 U2.5 Y1.1 | length 19
  Top Layer w0.2: Y1.1 130.344,59.63 129.619,59.63 129.344,59.905 C14.1 127.436,59.905 127.319,60.022 127.319,62.038 127.436,62.155 130.494,62.155 130.744,62.405 130.744,64.913 130.861,65.03 134.169,65.03 134.344,64.855 134.344,64.197 135.202,63.339 U2.5
HSE_OUT: C15.1 U2.6 Y1.3 | length 7.2
  Top Layer w0.2: Y1.3 133.425,61.161 133.425,63.374 133.094,63.705 C15.1 134.119,63.78 135.06,62.839 U2.6
NetC1_1: C1.1 U1.6 | length 1.9
  Top Layer w0.2: U1.6 143.819,72.83 C1.1
NetC1_2: C1.2 L1.1 U1.5 | length 41.2
  Top Layer w0.2: U1.5 143.969,71.905 144.268,71.605 144.443,71.605 144.718,71.33 C1.2 145.994,71.63 147.786,71.63 147.886,71.73 v1(147.994,71.73) ; L1.1 156.4,49.258 v1(156.7,48.958)
  Bottom Layer w0.2: v1(147.994,71.73) 148.519,72.255 148.519,72.746 149.178,73.405 151.61,73.405 154.227,70.788 154.227,61.572 156.7,59.099 v1(156.7,48.958)
NetC4_1: C4.1 C5.1 L2.2 U1.2 U1.3 | length 11.5
  Top Layer w0.2: U1.3 U1.2 141.369,72.155 140.869,72.155 139.444,73.58 C5.1 C4.1 140.469,76.83 141.369,75.93 L2.2
NetC6_1: C6.1 SW1.2 SW1.4 SW1.5 | length 17.6
  Top Layer w0.2: C6.1 129.809,50.417 129.926,50.3 131.425,50.3 132.195,49.53 SW1.5 132.869,49.155 132.044,48.33 132.044,46.192 132.306,45.93 134.944,45.93 135.744,46.73 SW1.2
NetC17_1: C17.1 U2.31 | length 2.3
  Top Layer w0.2: C17.1 145.4,54.571 145.468,54.639 145.468,55.987 U2.31
NetC18_1: C18.1 U2.47 | length 2.5
  Top Layer w0.2: U2.47 149.703,64.839 C18.1
NetC19_1: C19.1 FB2.2 U4.8 | length 3.5
  Top Layer w0.2: U4.8 140.519,48.434 140.069,47.984 C19.1 140.094,46.83 FB2.2
NetC20_1: C20.1 U4.5 | length 1.9
  Top Layer w0.2: C20.1 138.675,50.7 139.12,50.255 U4.5
NetD1_1: D1.1 F1.1 Q1.2 | length 9.2
  Top Layer w0.2: F1.1@147.175,80.96 147.119,80.904 147.119,76.78 147.629,76.27 D1.1 149.904,76.455 Q1.2
NetD1_2: D1.2 Q1.1 R1.1 | length 4
  Top Layer w0.2: R1.1 149.714,80.594 149.714,79.895 D1.2 150.629,79.54 151.061,79.108 151.061,79.088 151.794,78.355 Q1.1
NetD2_1: D2.1 D3.1 F1.2 L2.1 | length 10.1
  Top Layer w0.2: D2.1 139.126,80.975 F1.2 ; F1.2@141.96,80.685 141.96,77.621 L2.1 145.205,77.53 D3.1
NetD4_1: D4.1 R2.1 | length 3.4
  Top Layer w0.2: R2.1 132.05,73.355 133.076,72.329 D4.1
NetJ1_A5: J1.A5 R7.1 | length 3.1
  Top Layer w0.2: R7.1 154.008,68.38 J1.A5
NetJ1_B5: J1.B5 R8.1 | length 4.5
  Top Layer w0.2: R8.1 154.602,73.605 154.719,73.488 154.719,71.497 154.836,71.38 J1.B5
NetP1_3: P1.3 U2.49 | length 38.4
  Top Layer w0.2: U2.49 145.97,69.63 v1(147.944,69.63) ; P1.3@150.934,47.255 150.934,48.115 151.874,49.055 v1(152.519,49.055)
  Bottom Layer w0.2: v1(147.944,69.63) 148.919,70.605 148.919,72.58 149.344,73.005 151.444,73.005 153.319,71.13 153.319,59.905 152.519,59.105 v1(152.519,49.055)
NetP1_4: P1.4 U2.46 | length 24.4
  Top Layer w0.2: U2.46 149.035,64.339 149.894,63.48 v1(152.719,63.48) ; P1.4 148.394,48.155 149.294,49.055 v1(150.269,49.055)
  Bottom Layer w0.2: v1(150.269,49.055) 150.269,59.055 152.719,61.505 v1(152.719,63.48)
NetP2_3: P2.3 U2.16 | length 27.3
  Top Layer w0.2: P2.3@128.669,69.365 v1@131.154,69.365 ; v1(135.719,53.755) 135.769,53.806 135.769,57.793 135.816,57.839 U2.16
  Bottom Layer w0.254: v1(131.164,69.378) 131.816,68.726 131.816,53.932 132.198,53.55 135.42,53.55 135.625,53.755 v1(135.719,53.755)
NetP2_4: P2.4 U2.17 | length 25.9
  Top Layer w0.2: P2.4@128.669,66.825 v1(131.189,66.825) ; v1(137.119,53.73) 137.196,53.807 137.196,54.207 137.444,54.455 137.836,54.455 138.47,55.089 U2.17
  Bottom Layer w0.254: v1(131.189,66.825) 131.189,53.01 131.469,52.73 136.221,52.73 136.599,53.108 136.946,53.455 136.946,53.463 137.119,53.636 v1(137.119,53.73)
NetP3_2: P3.2 U2.40 | length 14.3
  Top Layer w0.2: U2.40 148.747,61.339 148.797,61.289 149.103,61.289 150.412,59.98 159.744,59.98 159.894,59.83 161.284,59.83 P3.2
NetP3_3: P3.3 U2.39 | length 16.3
  Top Layer w0.2: U2.39 148.747,60.839 148.797,60.789 149.038,60.789 150.247,59.58 159.277,59.58 159.394,59.463 159.394,57.48 159.744,57.13 P3.3
NetP3_4: P3.4 U2.38 | length 18.4
  Top Layer w0.2: U2.38 148.747,60.339 148.797,60.289 148.972,60.289 150.081,59.18 158.877,59.18 158.994,59.063 158.994,54.905 159.309,54.59 P3.4
NetP3_5: P3.5 U2.37 | length 20.3
  Top Layer w0.2: U2.37 148.747,59.839 148.797,59.789 148.906,59.789 149.99,58.705 158.477,58.705 158.594,58.588 158.594,52.755 159.299,52.05 P3.5
NetR3_2: R3.2 U2.24 U4.12 | length 13.4
  Top Layer w0.2: U2.24 141.97,55.062 142.02,55.012 142.02,54.903 143.819,53.104 143.819,50.066 143.008,49.255 ; U4.12 143.008,49.255 ; R3.2 147.194,50.48 146.894,50.18 146.894,50.13 146.019,49.255 143.008,49.255
NetR4_1: R4.1 U2.60 | length 2.9
  Top Layer w0.2: R4.1 139.475,69.675 139.775,69.375 139.775,69.325 140.47,68.63 U2.60
NetR5_2: R5.2 U2.45 | length 16.6
  Top Layer w0.125: U2.45 149.01,63.839 v1(150.469,62.38) ; v1(149.869,69.63) 150.369,69.63 R5.2
  Bottom Layer w0.125: v1(149.869,69.63) 150.469,69.03 150.469,68.381 150.475,68.375 149.975,68.375 149.975,67.9 150.5,67.9 150.5,67.4 149.975,67.4 149.975,66.925 150.475,66.925 150.475,66.45 150.06,66.45 cw(c150.06,66.535) 150,66.475 150,66.025 150.475,66.025 150.475,62.386 v1(150.469,62.38)
NetR6_2: R6.2 U2.44 | length 18.5
  Top Layer w0.125: U2.44 148.767,63.339 148.839,63.267 148.875,63.267 149.133,63.01 149.133,62.366 v1(150.494,61.005) ; v1(149.869,71.73) R6.2
  Bottom Layer w0.125: v1(149.869,71.73) 151.319,70.28 151.319,61.755 150.569,61.005 v1(150.494,61.005)
NetU2_20: U2.20 U4.4 | length 5.7
  Top Layer w0.2: U2.20 139.984,55.975 139.984,54.791 141,53.775 141,51.62 140.883,51.503 140.768,51.503 140.592,51.327 140.592,51.22 140.546,51.174 140.546,50.989 U4.4
NetU2_21: U2.21 U4.1 | length 6.2
  Top Layer w0.2: U2.21 140.47,55.062 140.52,55.012 140.52,54.903 142.675,52.748 142.675,51.617 U4.1
NetU2_22: U2.22 U4.14 | length 7.3
  Top Layer w0.2: U2.22 140.97,55.062 141.02,55.012 141.02,54.903 143.019,52.904 143.019,50.397 142.902,50.28 142.247,50.28 U4.14
NetU2_23: U2.23 U4.13 | length 8
  Top Layer w0.2: U2.23 141.47,55.062 141.52,55.012 141.52,54.903 143.419,53.004 143.419,50.231 142.943,49.755 U4.13
NRST: C6.2 P1.2 R9.1 SW1.1 SW1.3 U2.7 | length 53.7
  Top Layer w0.2: C6.2 131.019,51.439 131.019,52.505 131.294,52.78 R9.1 132.819,53.555 134.044,52.33 SW1.1 SW1.3 ; v1(134.228,62.339) U2.7 ; P1.2 153.474,48.125 154.404,49.055 v1(154.944,49.055)
  Top Layer w0.254: R9.1 131.294,54.255 v1(134.228,54.255)
  Bottom Layer w0.2: v1(134.228,62.339) v1(134.228,54.255) 135.102,54.255 135.202,54.355 137.343,54.355 137.725,53.973 137.725,51.849 141.469,48.105 154.827,48.105 154.944,48.222 v1(154.944,49.055)
USB_D_N: J1.A7 J1.B7 R6.1 U3.2 | length 7.9
  Top Layer w0.125: U3.2 151.719,70.88 153.921,70.88 ; R6.1 153.921,70.88 ; J1.B7 156.531,69.967 157.003,69.967 157.157,70.121 157.157,70.639 157.003,70.793 156.531,70.793 J1.A7 153.921,70.88
USB_D_P: J1.A6 J1.B6 R5.1 U3.1 | length 7.6
  Top Layer w0.125: U3.1 151.719,70.38 153.896,70.38 ; R5.1 153.896,70.38 ; J1.A6 156.444,69.355 155.394,69.355 155.394,70.38 ; J1.B6 155.394,70.38 ; 153.896,70.38 155.394,70.38
USB_VBUS: D3.2 J1.A4 J1.A9 J1.B4 J1.B9 | length 20.5
  Top Layer w0.3: 155.2,74.4 155.2,73.076 155.396,72.88 J1.A9 ; J1.B9 J1.A4 157.039,67.38 157.569,67.91 157.569,72.055 156.744,72.88 J1.A9 ; J1.B4 J1.A9
  Top Layer w0.5: D3.2@145.475,74.9 154.7,74.9 155.2,74.4
V_BAT: P4.1 Q1.3 | length 5.5
  Top Layer w0.5: Q1.3 155.734,77.405 P4.1
pads on no net: J1.A8 J1.B8 U2.2 U2.3 U2.4 U2.8 U2.9 U2.10 U2.11 U2.14 U2.15 U2.25 U2.26 U2.27 U2.28 U2.29 U2.30 U2.33 U2.34 U2.35 U2.36 U2.41 U2.42 U2.43 U2.50 U2.51 U2.52 U2.53 U2.54 U2.55 U2.56 U2.57 U2.58 U2.59 U2.61 U2.62 U4.2 U4.3 U4.9 U4.10 U4.11

## Polygon pours and split planes (outlines as drawn)
GND on Top Layer "GND_L01_P025" (solid, pour order 25): 136.4,72.6 133.85,72.6 132.65,73.8 131.55,73.8 131.55,76.234 132.85,77.534 132.85,82 133.05,82.2 136.4,82.2
3V3 on Top Layer "3V3_L01_P014" (solid, pour order 14): 152.975,58.15 153.025,58.15 153.025,49.98 149.425,49.98 146.925,47.122 146.925,45.55 143.275,45.55 142.55,46.4 142.55,47.4 144.875,47.4 145.975,48.9 146.925,48.9 149.675,51.95 149.675,58.125
GND on Top Layer "GND_L01_P038" (solid, pour order 38): 131.45,64.275 131.45,62.025 130.6,62.025 130.075,61.5 127.9,61.5 127.9,60.725 128.05,60.575 129.625,60.575 130.1,60.1 131.725,60.1 131.725,57.95 131.075,57.3 130.375,57.3 130.375,56.55 130.575,56.35 131.45,56.35 131.45,56.925 133.05,58.525 133.825,58.525 133.825,59.875 133.775,59.925 132.125,59.925 132.125,63.15 132.45,63.475 132.45,64.275
GND on Top Layer "GND_L01_P033" (solid, pour order 33): 152.1,64.3 155.325,64.3 155.325,65.825 154.85,66.3 153.45,66.3 153.45,68 153.425,68.025 151.108,68.025 150.975,67.892 150.975,66.3 151.65,66.3 152.075,65.875
GND on Top Layer "GND_L01_P028" (solid, pour order 28): 148.075,52.925 147.075,52.925 145.975,51.825 144.575,51.825 144.15,51.4 144.15,49.5 145.875,49.5 146.325,49.95 146.325,51.275 147.2,52.15 148.075,52.15
GND on Top Layer "GND_L01_P027" (solid, pour order 27): 149.2,82.5 149.2,81.7 150.1,81.7 150.6,81.2 150.6,80.3 151.3,80.3 151.5,80.1 153.8,80.1 154.3,80.6 154.3,82.5